# EAGLE board QRE1113 Line Sensor Breakout - Analog-GiantPanelv12 (EAGLE 6.4), part 1 of 6
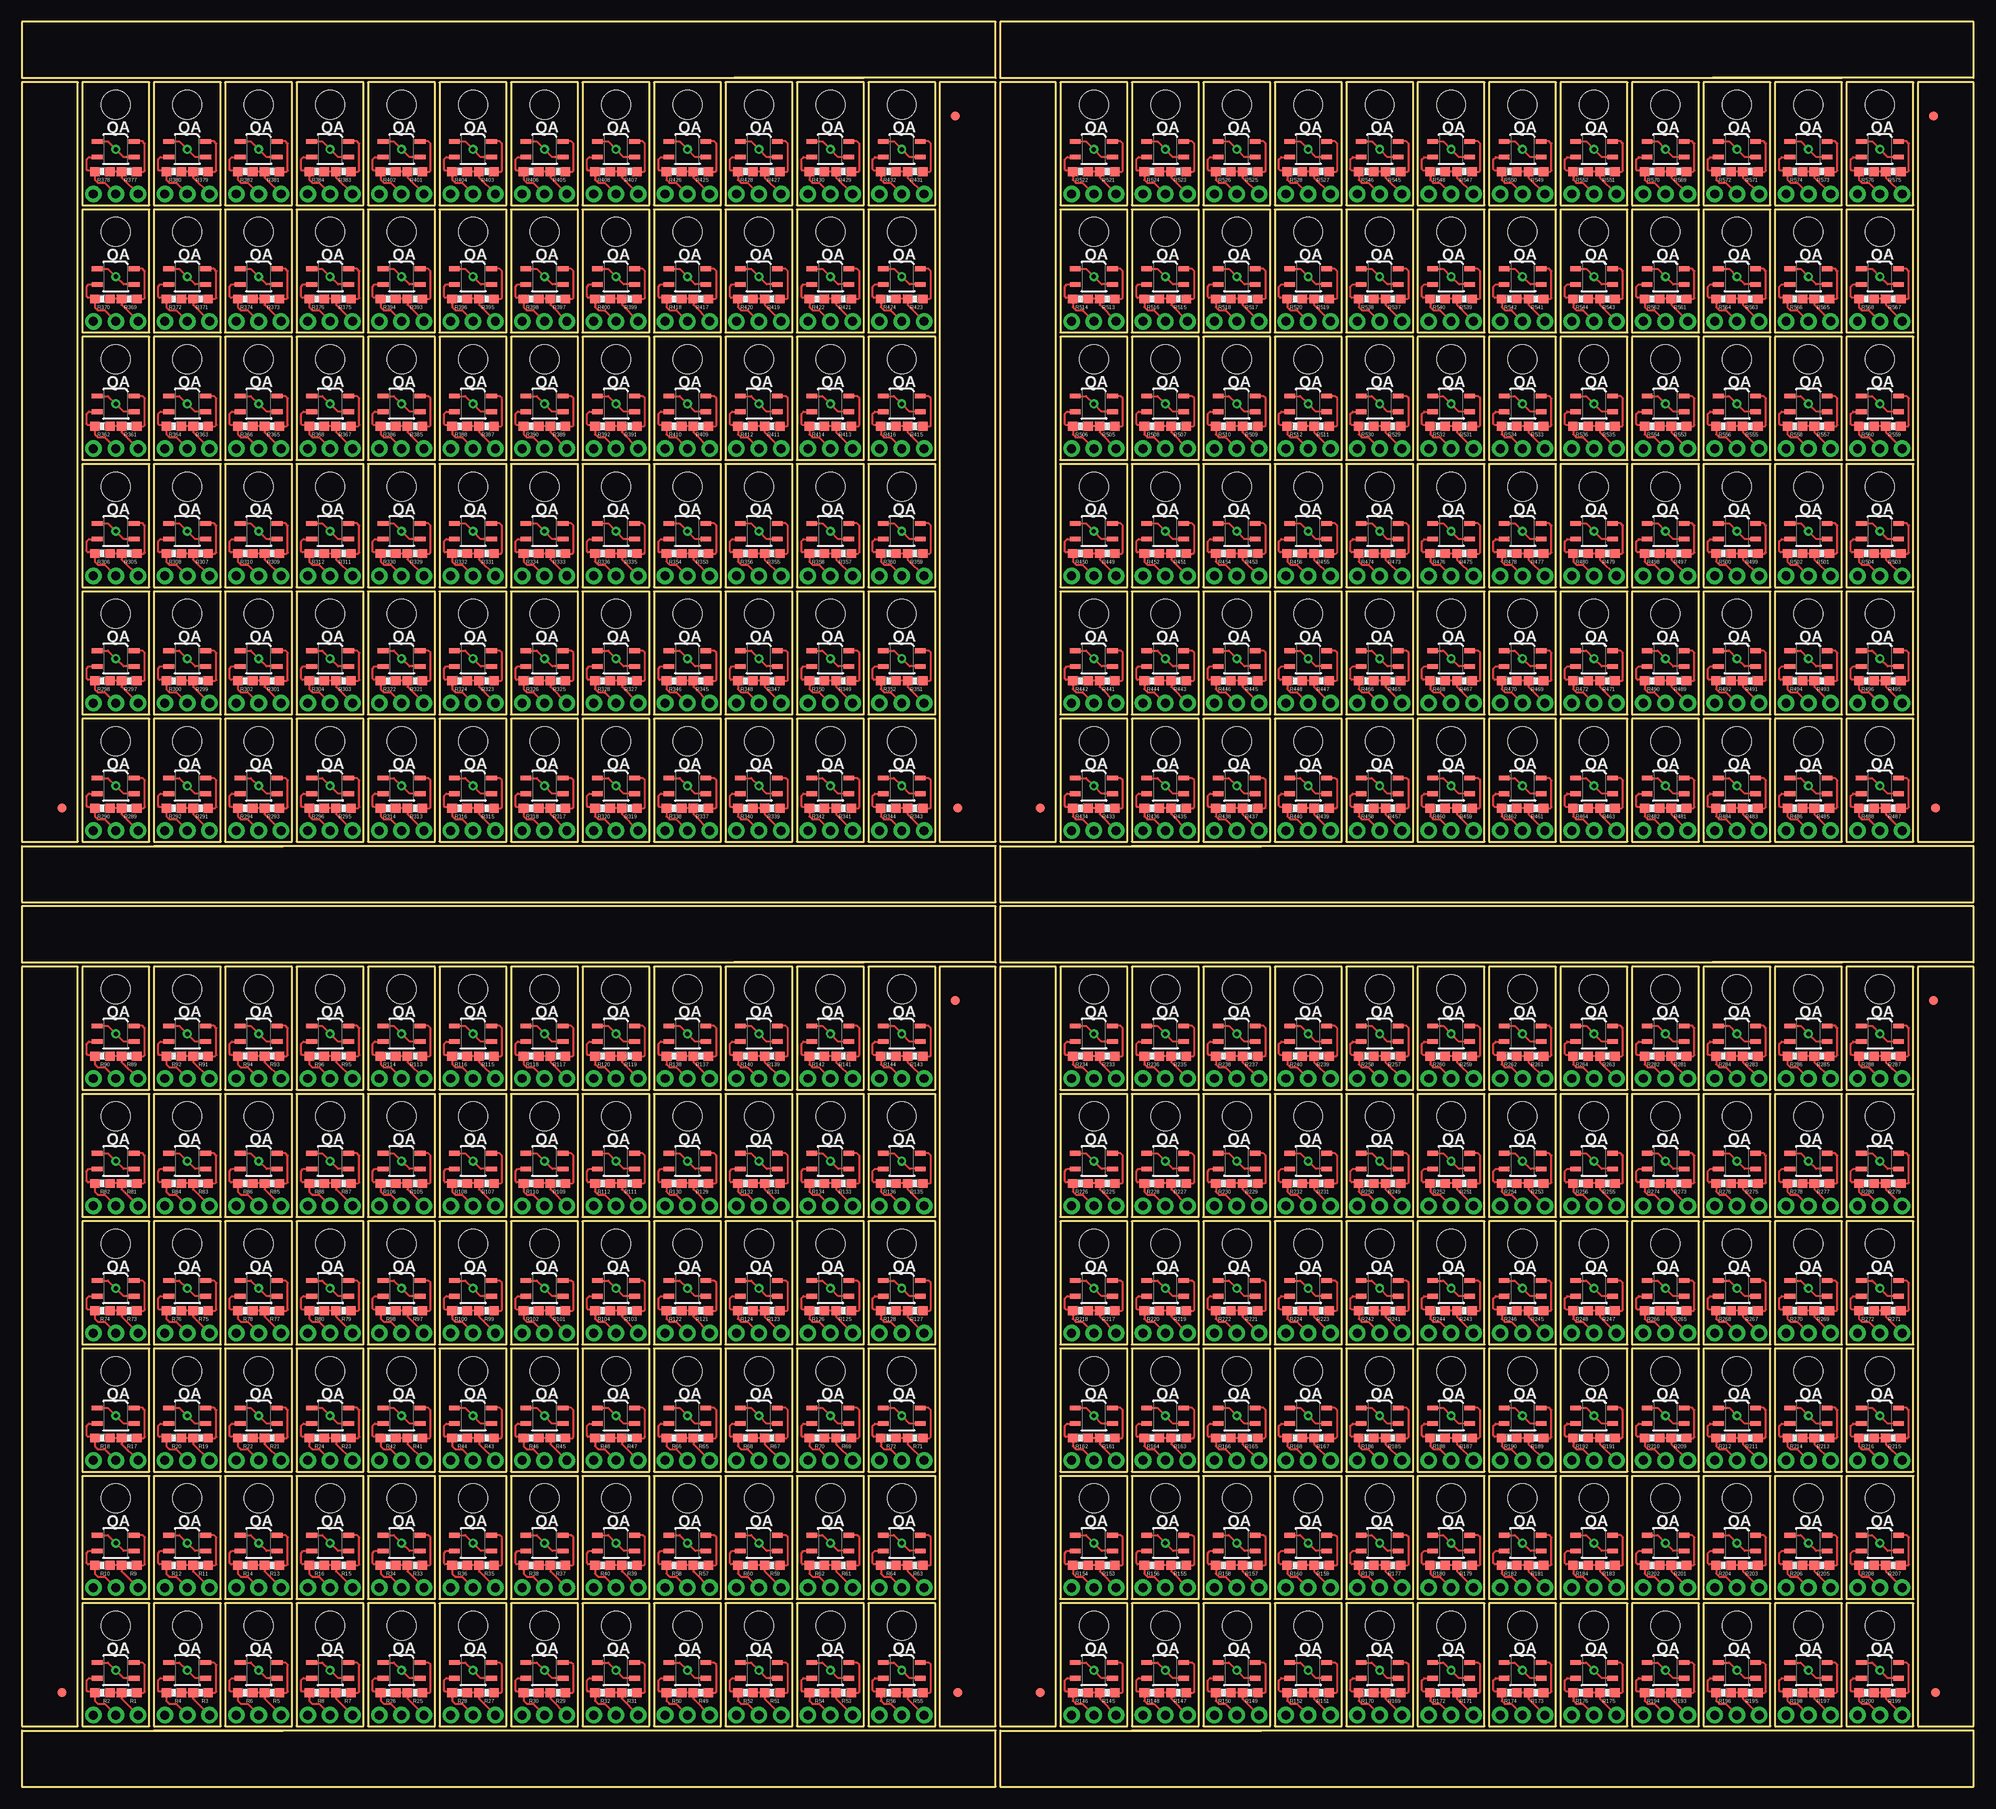
[diagram p0: board, top side]
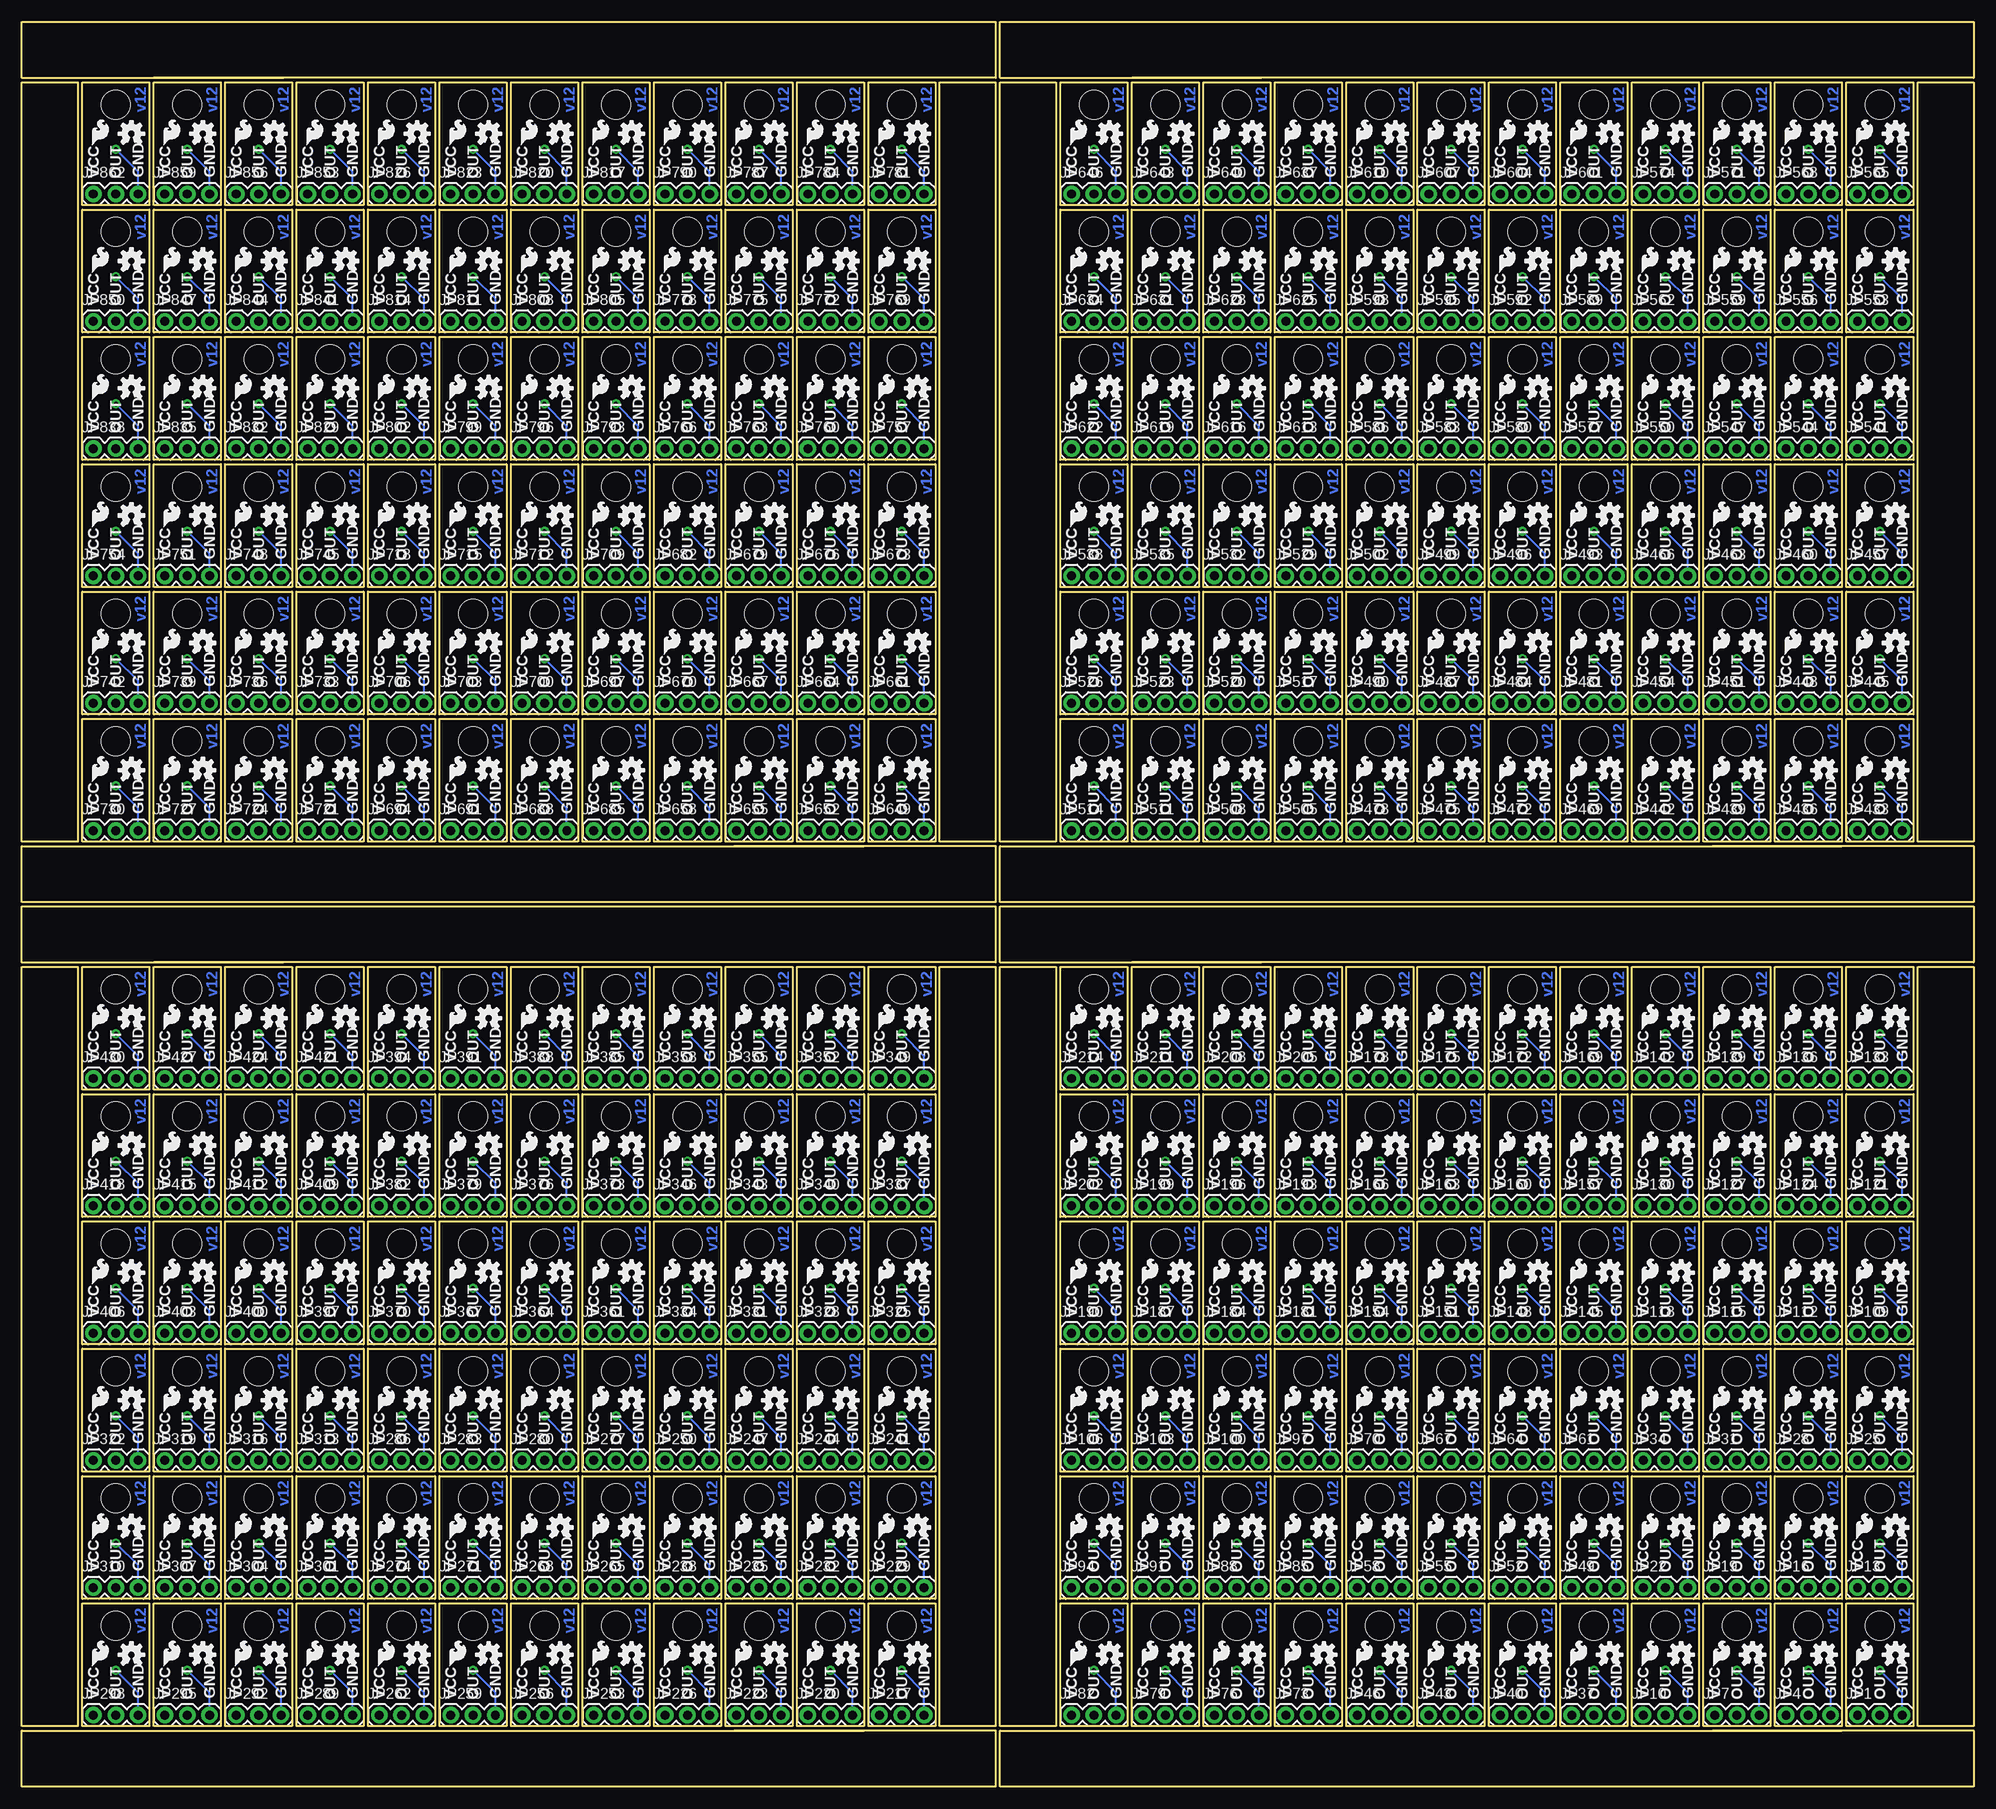
[diagram p1: board, bottom side, seen from below]

Size 222 x 200.66 mm. Coordinates in mm from the lower left corner, seen from the top.
Outline: 1224 segments
Copper layers (1*16): Top 0.035mm / dielectric 1.5mm / Bottom 0.035mm
Design rules "SparkFun *": minimum track width 8mil, minimum drill 20mil, track to track 8mil, track to pad 8mil, pad to pad 8mil, via to via 8mil, smd to smd 8mil, copper to edge 9mil, drill to drill 8mil, minimum pad ring 12mil, minimum via ring 10mil, stop-mask expansion 4mil, vias tented up to drill 20mil, thermal gap 10mil

## Footprints (pad centres in the part's own frame; a part is rotated, then mirrored left to right if it is on the bottom)
FIDUCIAL-1X2 = smd 1 x 1: 1 0,0
1X03 = drill 1.016 pad 1.88: 1 0,0; 2 2.54,0; 3 5.08,0
STAND-OFF = hole 3.302: 0,0
0603-RES = smd 1.1 x 1: 1 -0.85,0; 2 0.85,0
QRE1113-1:1 = smd 1.219 x 0.533: 1 -2.108,-0.889; 2 2.108,-0.889; 3 2.108,0.889; 4 -2.108,0.889

## Placement (x,y rotation side)
E$1  [FIDUCIAL-1X2]  4.57,10.67 0 top
E$4  [FIDUCIAL-1X2]  106.43,10.67 0 top
E$5  [FIDUCIAL-1X2]  106.17,89.41 180 top
E$9  [FIDUCIAL-1X2]  115.82,10.67 0 top
E$12  [FIDUCIAL-1X2]  217.68,10.67 0 top
E$13  [FIDUCIAL-1X2]  217.42,89.41 180 top
E$17  [FIDUCIAL-1X2]  4.57,111.25 0 top
E$20  [FIDUCIAL-1X2]  106.43,111.25 0 top
E$21  [FIDUCIAL-1X2]  106.17,189.99 180 top
E$25  [FIDUCIAL-1X2]  115.82,111.25 0 top
E$28  [FIDUCIAL-1X2]  217.68,111.25 0 top
E$29  [FIDUCIAL-1X2]  217.42,189.99 180 top
JP1  [1X03]  13.21,8.13 0 bottom
JP2  LOGO-SFESK  [SFE-LOGO-FLAME]  13.34,13.72 0 bottom
JP3  STAND-OFF  [STAND-OFF]  10.67,18.29 0 top
JP4  [1X03]  21.34,8.13 0 bottom
JP5  LOGO-SFESK  [SFE-LOGO-FLAME]  21.46,13.72 0 bottom
JP6  STAND-OFF  [STAND-OFF]  18.8,18.29 0 top
JP7  [1X03]  29.46,8.13 0 bottom
JP8  LOGO-SFESK  [SFE-LOGO-FLAME]  29.59,13.72 0 bottom
JP9  STAND-OFF  [STAND-OFF]  26.92,18.29 0 top
JP10  [1X03]  37.59,8.13 0 bottom
JP11  LOGO-SFESK  [SFE-LOGO-FLAME]  37.72,13.72 0 bottom
JP12  STAND-OFF  [STAND-OFF]  35.05,18.29 0 top
JP13  [1X03]  13.21,22.61 0 bottom
JP14  LOGO-SFESK  [SFE-LOGO-FLAME]  13.34,28.19 0 bottom
JP15  STAND-OFF  [STAND-OFF]  10.67,32.77 0 top
JP16  [1X03]  21.34,22.61 0 bottom
JP17  LOGO-SFESK  [SFE-LOGO-FLAME]  21.46,28.19 0 bottom
JP18  STAND-OFF  [STAND-OFF]  18.8,32.77 0 top
JP19  [1X03]  29.46,22.61 0 bottom
JP20  LOGO-SFESK  [SFE-LOGO-FLAME]  29.59,28.19 0 bottom
JP21  STAND-OFF  [STAND-OFF]  26.92,32.77 0 top
JP22  [1X03]  37.59,22.61 0 bottom
JP23  LOGO-SFESK  [SFE-LOGO-FLAME]  37.72,28.19 0 bottom
JP24  STAND-OFF  [STAND-OFF]  35.05,32.77 0 top
JP25  [1X03]  13.21,37.08 0 bottom
JP26  LOGO-SFESK  [SFE-LOGO-FLAME]  13.34,42.67 0 bottom
JP27  STAND-OFF  [STAND-OFF]  10.67,47.24 0 top
JP28  [1X03]  21.34,37.08 0 bottom
JP29  LOGO-SFESK  [SFE-LOGO-FLAME]  21.46,42.67 0 bottom
JP30  STAND-OFF  [STAND-OFF]  18.8,47.24 0 top
JP31  [1X03]  29.46,37.08 0 bottom
JP32  LOGO-SFESK  [SFE-LOGO-FLAME]  29.59,42.67 0 bottom
JP33  STAND-OFF  [STAND-OFF]  26.92,47.24 0 top
JP34  [1X03]  37.59,37.08 0 bottom
JP35  LOGO-SFESK  [SFE-LOGO-FLAME]  37.72,42.67 0 bottom
JP36  STAND-OFF  [STAND-OFF]  35.05,47.24 0 top
JP37  [1X03]  45.72,8.13 0 bottom
JP38  LOGO-SFESK  [SFE-LOGO-FLAME]  45.85,13.72 0 bottom
JP39  STAND-OFF  [STAND-OFF]  43.18,18.29 0 top
JP40  [1X03]  53.85,8.13 0 bottom
JP41  LOGO-SFESK  [SFE-LOGO-FLAME]  53.98,13.72 0 bottom
JP42  STAND-OFF  [STAND-OFF]  51.31,18.29 0 top
JP43  [1X03]  61.98,8.13 0 bottom
JP44  LOGO-SFESK  [SFE-LOGO-FLAME]  62.1,13.72 0 bottom
JP45  STAND-OFF  [STAND-OFF]  59.44,18.29 0 top
JP46  [1X03]  70.1,8.13 0 bottom
JP47  LOGO-SFESK  [SFE-LOGO-FLAME]  70.23,13.72 0 bottom
JP48  STAND-OFF  [STAND-OFF]  67.56,18.29 0 top
JP49  [1X03]  45.72,22.61 0 bottom
JP50  LOGO-SFESK  [SFE-LOGO-FLAME]  45.85,28.19 0 bottom
JP51  STAND-OFF  [STAND-OFF]  43.18,32.77 0 top
JP52  [1X03]  53.85,22.61 0 bottom
JP53  LOGO-SFESK  [SFE-LOGO-FLAME]  53.98,28.19 0 bottom
JP54  STAND-OFF  [STAND-OFF]  51.31,32.77 0 top
JP55  [1X03]  61.98,22.61 0 bottom
JP56  LOGO-SFESK  [SFE-LOGO-FLAME]  62.1,28.19 0 bottom
JP57  STAND-OFF  [STAND-OFF]  59.44,32.77 0 top
JP58  [1X03]  70.1,22.61 0 bottom
JP59  LOGO-SFESK  [SFE-LOGO-FLAME]  70.23,28.19 0 bottom
JP60  STAND-OFF  [STAND-OFF]  67.56,32.77 0 top
JP61  [1X03]  45.72,37.08 0 bottom
JP62  LOGO-SFESK  [SFE-LOGO-FLAME]  45.85,42.67 0 bottom
JP63  STAND-OFF  [STAND-OFF]  43.18,47.24 0 top
JP64  [1X03]  53.85,37.08 0 bottom
JP65  LOGO-SFESK  [SFE-LOGO-FLAME]  53.98,42.67 0 bottom
JP66  STAND-OFF  [STAND-OFF]  51.31,47.24 0 top
JP67  [1X03]  61.98,37.08 0 bottom
JP68  LOGO-SFESK  [SFE-LOGO-FLAME]  62.1,42.67 0 bottom
JP69  STAND-OFF  [STAND-OFF]  59.44,47.24 0 top
JP70  [1X03]  70.1,37.08 0 bottom
JP71  LOGO-SFESK  [SFE-LOGO-FLAME]  70.23,42.67 0 bottom
JP72  STAND-OFF  [STAND-OFF]  67.56,47.24 0 top
JP73  [1X03]  78.23,8.13 0 bottom
JP74  LOGO-SFESK  [SFE-LOGO-FLAME]  78.36,13.72 0 bottom
JP75  STAND-OFF  [STAND-OFF]  75.69,18.29 0 top
JP76  [1X03]  86.36,8.13 0 bottom
JP77  LOGO-SFESK  [SFE-LOGO-FLAME]  86.49,13.72 0 bottom
JP78  STAND-OFF  [STAND-OFF]  83.82,18.29 0 top
JP79  [1X03]  94.49,8.13 0 bottom
JP80  LOGO-SFESK  [SFE-LOGO-FLAME]  94.61,13.72 0 bottom
JP81  STAND-OFF  [STAND-OFF]  91.95,18.29 0 top
JP82  [1X03]  102.62,8.13 0 bottom
JP83  LOGO-SFESK  [SFE-LOGO-FLAME]  102.74,13.72 0 bottom
JP84  STAND-OFF  [STAND-OFF]  100.08,18.29 0 top
JP85  [1X03]  78.23,22.61 0 bottom
JP86  LOGO-SFESK  [SFE-LOGO-FLAME]  78.36,28.19 0 bottom
JP87  STAND-OFF  [STAND-OFF]  75.69,32.77 0 top
JP88  [1X03]  86.36,22.61 0 bottom
JP89  LOGO-SFESK  [SFE-LOGO-FLAME]  86.49,28.19 0 bottom
JP90  STAND-OFF  [STAND-OFF]  83.82,32.77 0 top
JP91  [1X03]  94.49,22.61 0 bottom
JP92  LOGO-SFESK  [SFE-LOGO-FLAME]  94.61,28.19 0 bottom
JP93  STAND-OFF  [STAND-OFF]  91.95,32.77 0 top
JP94  [1X03]  102.62,22.61 0 bottom
JP95  LOGO-SFESK  [SFE-LOGO-FLAME]  102.74,28.19 0 bottom
JP96  STAND-OFF  [STAND-OFF]  100.08,32.77 0 top
JP97  [1X03]  78.23,37.08 0 bottom
JP98  LOGO-SFESK  [SFE-LOGO-FLAME]  78.36,42.67 0 bottom
JP99  STAND-OFF  [STAND-OFF]  75.69,47.24 0 top
JP100  [1X03]  86.36,37.08 0 bottom
JP101  LOGO-SFESK  [SFE-LOGO-FLAME]  86.49,42.67 0 bottom
JP102  STAND-OFF  [STAND-OFF]  83.82,47.24 0 top
JP103  [1X03]  94.49,37.08 0 bottom
JP104  LOGO-SFESK  [SFE-LOGO-FLAME]  94.61,42.67 0 bottom
JP105  STAND-OFF  [STAND-OFF]  91.95,47.24 0 top
JP106  [1X03]  102.62,37.08 0 bottom
JP107  LOGO-SFESK  [SFE-LOGO-FLAME]  102.74,42.67 0 bottom
JP108  STAND-OFF  [STAND-OFF]  100.08,47.24 0 top
JP109  [1X03]  13.21,51.56 0 bottom
JP110  LOGO-SFESK  [SFE-LOGO-FLAME]  13.34,57.15 0 bottom
JP111  STAND-OFF  [STAND-OFF]  10.67,61.72 0 top
JP112  [1X03]  21.34,51.56 0 bottom
JP113  LOGO-SFESK  [SFE-LOGO-FLAME]  21.46,57.15 0 bottom
JP114  STAND-OFF  [STAND-OFF]  18.8,61.72 0 top
JP115  [1X03]  29.46,51.56 0 bottom
JP116  LOGO-SFESK  [SFE-LOGO-FLAME]  29.59,57.15 0 bottom
JP117  STAND-OFF  [STAND-OFF]  26.92,61.72 0 top
JP118  [1X03]  37.59,51.56 0 bottom
JP119  LOGO-SFESK  [SFE-LOGO-FLAME]  37.72,57.15 0 bottom
JP120  STAND-OFF  [STAND-OFF]  35.05,61.72 0 top
JP121  [1X03]  13.21,66.04 0 bottom
JP122  LOGO-SFESK  [SFE-LOGO-FLAME]  13.34,71.63 0 bottom
JP123  STAND-OFF  [STAND-OFF]  10.67,76.2 0 top
JP124  [1X03]  21.34,66.04 0 bottom
JP125  LOGO-SFESK  [SFE-LOGO-FLAME]  21.46,71.63 0 bottom
JP126  STAND-OFF  [STAND-OFF]  18.8,76.2 0 top
JP127  [1X03]  29.46,66.04 0 bottom
JP128  LOGO-SFESK  [SFE-LOGO-FLAME]  29.59,71.63 0 bottom
JP129  STAND-OFF  [STAND-OFF]  26.92,76.2 0 top
JP130  [1X03]  37.59,66.04 0 bottom
JP131  LOGO-SFESK  [SFE-LOGO-FLAME]  37.72,71.63 0 bottom
JP132  STAND-OFF  [STAND-OFF]  35.05,76.2 0 top
JP133  [1X03]  13.21,80.52 0 bottom
JP134  LOGO-SFESK  [SFE-LOGO-FLAME]  13.34,86.11 0 bottom
JP135  STAND-OFF  [STAND-OFF]  10.67,90.68 0 top
JP136  [1X03]  21.34,80.52 0 bottom
JP137  LOGO-SFESK  [SFE-LOGO-FLAME]  21.46,86.11 0 bottom
JP138  STAND-OFF  [STAND-OFF]  18.8,90.68 0 top
JP139  [1X03]  29.46,80.52 0 bottom
JP140  LOGO-SFESK  [SFE-LOGO-FLAME]  29.59,86.11 0 bottom
JP141  STAND-OFF  [STAND-OFF]  26.92,90.68 0 top
JP142  [1X03]  37.59,80.52 0 bottom
JP143  LOGO-SFESK  [SFE-LOGO-FLAME]  37.72,86.11 0 bottom
JP144  STAND-OFF  [STAND-OFF]  35.05,90.68 0 top
JP145  [1X03]  45.72,51.56 0 bottom
JP146  LOGO-SFESK  [SFE-LOGO-FLAME]  45.85,57.15 0 bottom
JP147  STAND-OFF  [STAND-OFF]  43.18,61.72 0 top
JP148  [1X03]  53.85,51.56 0 bottom
JP149  LOGO-SFESK  [SFE-LOGO-FLAME]  53.98,57.15 0 bottom
JP150  STAND-OFF  [STAND-OFF]  51.31,61.72 0 top
JP151  [1X03]  61.98,51.56 0 bottom
JP152  LOGO-SFESK  [SFE-LOGO-FLAME]  62.1,57.15 0 bottom
JP153  STAND-OFF  [STAND-OFF]  59.44,61.72 0 top
JP154  [1X03]  70.1,51.56 0 bottom
JP155  LOGO-SFESK  [SFE-LOGO-FLAME]  70.23,57.15 0 bottom
JP156  STAND-OFF  [STAND-OFF]  67.56,61.72 0 top
JP157  [1X03]  45.72,66.04 0 bottom
JP158  LOGO-SFESK  [SFE-LOGO-FLAME]  45.85,71.63 0 bottom
JP159  STAND-OFF  [STAND-OFF]  43.18,76.2 0 top
JP160  [1X03]  53.85,66.04 0 bottom
JP161  LOGO-SFESK  [SFE-LOGO-FLAME]  53.98,71.63 0 bottom
JP162  STAND-OFF  [STAND-OFF]  51.31,76.2 0 top
JP163  [1X03]  61.98,66.04 0 bottom
JP164  LOGO-SFESK  [SFE-LOGO-FLAME]  62.1,71.63 0 bottom
JP165  STAND-OFF  [STAND-OFF]  59.44,76.2 0 top
JP166  [1X03]  70.1,66.04 0 bottom
JP167  LOGO-SFESK  [SFE-LOGO-FLAME]  70.23,71.63 0 bottom
JP168  STAND-OFF  [STAND-OFF]  67.56,76.2 0 top
JP169  [1X03]  45.72,80.52 0 bottom
JP170  LOGO-SFESK  [SFE-LOGO-FLAME]  45.85,86.11 0 bottom
JP171  STAND-OFF  [STAND-OFF]  43.18,90.68 0 top
JP172  [1X03]  53.85,80.52 0 bottom
JP173  LOGO-SFESK  [SFE-LOGO-FLAME]  53.98,86.11 0 bottom
JP174  STAND-OFF  [STAND-OFF]  51.31,90.68 0 top
JP175  [1X03]  61.98,80.52 0 bottom
JP176  LOGO-SFESK  [SFE-LOGO-FLAME]  62.1,86.11 0 bottom
JP177  STAND-OFF  [STAND-OFF]  59.44,90.68 0 top
JP178  [1X03]  70.1,80.52 0 bottom
JP179  LOGO-SFESK  [SFE-LOGO-FLAME]  70.23,86.11 0 bottom
JP180  STAND-OFF  [STAND-OFF]  67.56,90.68 0 top
JP181  [1X03]  78.23,51.56 0 bottom
JP182  LOGO-SFESK  [SFE-LOGO-FLAME]  78.36,57.15 0 bottom
JP183  STAND-OFF  [STAND-OFF]  75.69,61.72 0 top
JP184  [1X03]  86.36,51.56 0 bottom
JP185  LOGO-SFESK  [SFE-LOGO-FLAME]  86.49,57.15 0 bottom
JP186  STAND-OFF  [STAND-OFF]  83.82,61.72 0 top
JP187  [1X03]  94.49,51.56 0 bottom
JP188  LOGO-SFESK  [SFE-LOGO-FLAME]  94.61,57.15 0 bottom
JP189  STAND-OFF  [STAND-OFF]  91.95,61.72 0 top
JP190  [1X03]  102.62,51.56 0 bottom
JP191  LOGO-SFESK  [SFE-LOGO-FLAME]  102.74,57.15 0 bottom
JP192  STAND-OFF  [STAND-OFF]  100.08,61.72 0 top
JP193  [1X03]  78.23,66.04 0 bottom
JP194  LOGO-SFESK  [SFE-LOGO-FLAME]  78.36,71.63 0 bottom
JP195  STAND-OFF  [STAND-OFF]  75.69,76.2 0 top
JP196  [1X03]  86.36,66.04 0 bottom
JP197  LOGO-SFESK  [SFE-LOGO-FLAME]  86.49,71.63 0 bottom
JP198  STAND-OFF  [STAND-OFF]  83.82,76.2 0 top
JP199  [1X03]  94.49,66.04 0 bottom
JP200  LOGO-SFESK  [SFE-LOGO-FLAME]  94.61,71.63 0 bottom
JP201  STAND-OFF  [STAND-OFF]  91.95,76.2 0 top
JP202  [1X03]  102.62,66.04 0 bottom
JP203  LOGO-SFESK  [SFE-LOGO-FLAME]  102.74,71.63 0 bottom
JP204  STAND-OFF  [STAND-OFF]  100.08,76.2 0 top
JP205  [1X03]  78.23,80.52 0 bottom
JP206  LOGO-SFESK  [SFE-LOGO-FLAME]  78.36,86.11 0 bottom
JP207  STAND-OFF  [STAND-OFF]  75.69,90.68 0 top
JP208  [1X03]  86.36,80.52 0 bottom
JP209  LOGO-SFESK  [SFE-LOGO-FLAME]  86.49,86.11 0 bottom
JP210  STAND-OFF  [STAND-OFF]  83.82,90.68 0 top
JP211  [1X03]  94.49,80.52 0 bottom
JP212  LOGO-SFESK  [SFE-LOGO-FLAME]  94.61,86.11 0 bottom
JP213  STAND-OFF  [STAND-OFF]  91.95,90.68 0 top
JP214  [1X03]  102.62,80.52 0 bottom
JP215  LOGO-SFESK  [SFE-LOGO-FLAME]  102.74,86.11 0 bottom
JP216  STAND-OFF  [STAND-OFF]  100.08,90.68 0 top
JP217  [1X03]  124.46,8.13 0 bottom
JP218  LOGO-SFESK  [SFE-LOGO-FLAME]  124.59,13.72 0 bottom
JP219  STAND-OFF  [STAND-OFF]  121.92,18.29 0 top
JP220  [1X03]  132.59,8.13 0 bottom
JP221  LOGO-SFESK  [SFE-LOGO-FLAME]  132.72,13.72 0 bottom
JP222  STAND-OFF  [STAND-OFF]  130.05,18.29 0 top
JP223  [1X03]  140.72,8.13 0 bottom
JP224  LOGO-SFESK  [SFE-LOGO-FLAME]  140.84,13.72 0 bottom
JP225  STAND-OFF  [STAND-OFF]  138.18,18.29 0 top
JP226  [1X03]  148.84,8.13 0 bottom
JP227  LOGO-SFESK  [SFE-LOGO-FLAME]  148.97,13.72 0 bottom
JP228  STAND-OFF  [STAND-OFF]  146.3,18.29 0 top
JP229  [1X03]  124.46,22.61 0 bottom
JP230  LOGO-SFESK  [SFE-LOGO-FLAME]  124.59,28.19 0 bottom
JP231  STAND-OFF  [STAND-OFF]  121.92,32.77 0 top
JP232  [1X03]  132.59,22.61 0 bottom
JP233  LOGO-SFESK  [SFE-LOGO-FLAME]  132.72,28.19 0 bottom
JP234  STAND-OFF  [STAND-OFF]  130.05,32.77 0 top
JP235  [1X03]  140.72,22.61 0 bottom
JP236  LOGO-SFESK  [SFE-LOGO-FLAME]  140.84,28.19 0 bottom
JP237  STAND-OFF  [STAND-OFF]  138.18,32.77 0 top
JP238  [1X03]  148.84,22.61 0 bottom
JP239  LOGO-SFESK  [SFE-LOGO-FLAME]  148.97,28.19 0 bottom
JP240  STAND-OFF  [STAND-OFF]  146.3,32.77 0 top
JP241  [1X03]  124.46,37.08 0 bottom
JP242  LOGO-SFESK  [SFE-LOGO-FLAME]  124.59,42.67 0 bottom
JP243  STAND-OFF  [STAND-OFF]  121.92,47.24 0 top
JP244  [1X03]  132.59,37.08 0 bottom
JP245  LOGO-SFESK  [SFE-LOGO-FLAME]  132.72,42.67 0 bottom
JP246  STAND-OFF  [STAND-OFF]  130.05,47.24 0 top
JP247  [1X03]  140.72,37.08 0 bottom
JP248  LOGO-SFESK  [SFE-LOGO-FLAME]  140.84,42.67 0 bottom
JP249  STAND-OFF  [STAND-OFF]  138.18,47.24 0 top
JP250  [1X03]  148.84,37.08 0 bottom
JP251  LOGO-SFESK  [SFE-LOGO-FLAME]  148.97,42.67 0 bottom
JP252  STAND-OFF  [STAND-OFF]  146.3,47.24 0 top
JP253  [1X03]  156.97,8.13 0 bottom
JP254  LOGO-SFESK  [SFE-LOGO-FLAME]  157.1,13.72 0 bottom
JP255  STAND-OFF  [STAND-OFF]  154.43,18.29 0 top
JP256  [1X03]  165.1,8.13 0 bottom
JP257  LOGO-SFESK  [SFE-LOGO-FLAME]  165.23,13.72 0 bottom
JP258  STAND-OFF  [STAND-OFF]  162.56,18.29 0 top
JP259  [1X03]  173.23,8.13 0 bottom
JP260  LOGO-SFESK  [SFE-LOGO-FLAME]  173.35,13.72 0 bottom
JP261  STAND-OFF  [STAND-OFF]  170.69,18.29 0 top
JP262  [1X03]  181.36,8.13 0 bottom
JP263  LOGO-SFESK  [SFE-LOGO-FLAME]  181.48,13.72 0 bottom
JP264  STAND-OFF  [STAND-OFF]  178.82,18.29 0 top
JP265  [1X03]  156.97,22.61 0 bottom
JP266  LOGO-SFESK  [SFE-LOGO-FLAME]  157.1,28.19 0 bottom
JP267  STAND-OFF  [STAND-OFF]  154.43,32.77 0 top
JP268  [1X03]  165.1,22.61 0 bottom
JP269  LOGO-SFESK  [SFE-LOGO-FLAME]  165.23,28.19 0 bottom
JP270  STAND-OFF  [STAND-OFF]  162.56,32.77 0 top
JP271  [1X03]  173.23,22.61 0 bottom
JP272  LOGO-SFESK  [SFE-LOGO-FLAME]  173.35,28.19 0 bottom
JP273  STAND-OFF  [STAND-OFF]  170.69,32.77 0 top
JP274  [1X03]  181.36,22.61 0 bottom
JP275  LOGO-SFESK  [SFE-LOGO-FLAME]  181.48,28.19 0 bottom
JP276  STAND-OFF  [STAND-OFF]  178.82,32.77 0 top
JP277  [1X03]  156.97,37.08 0 bottom
JP278  LOGO-SFESK  [SFE-LOGO-FLAME]  157.1,42.67 0 bottom
JP279  STAND-OFF  [STAND-OFF]  154.43,47.24 0 top
JP280  [1X03]  165.1,37.08 0 bottom
JP281  LOGO-SFESK  [SFE-LOGO-FLAME]  165.23,42.67 0 bottom
JP282  STAND-OFF  [STAND-OFF]  162.56,47.24 0 top
JP283  [1X03]  173.23,37.08 0 bottom
JP284  LOGO-SFESK  [SFE-LOGO-FLAME]  173.35,42.67 0 bottom
JP285  STAND-OFF  [STAND-OFF]  170.69,47.24 0 top
JP286  [1X03]  181.36,37.08 0 bottom
JP287  LOGO-SFESK  [SFE-LOGO-FLAME]  181.48,42.67 0 bottom
JP288  STAND-OFF  [STAND-OFF]  178.82,47.24 0 top
JP289  [1X03]  189.48,8.13 0 bottom
JP290  LOGO-SFESK  [SFE-LOGO-FLAME]  189.61,13.72 0 bottom
JP291  STAND-OFF  [STAND-OFF]  186.94,18.29 0 top
JP292  [1X03]  197.61,8.13 0 bottom
JP293  LOGO-SFESK  [SFE-LOGO-FLAME]  197.74,13.72 0 bottom
JP294  STAND-OFF  [STAND-OFF]  195.07,18.29 0 top
JP295  [1X03]  205.74,8.13 0 bottom
JP296  LOGO-SFESK  [SFE-LOGO-FLAME]  205.87,13.72 0 bottom
JP297  STAND-OFF  [STAND-OFF]  203.2,18.29 0 top
JP298  [1X03]  213.87,8.13 0 bottom
JP299  LOGO-SFESK  [SFE-LOGO-FLAME]  214,13.72 0 bottom
JP300  STAND-OFF  [STAND-OFF]  211.33,18.29 0 top
JP301  [1X03]  189.48,22.61 0 bottom
JP302  LOGO-SFESK  [SFE-LOGO-FLAME]  189.61,28.19 0 bottom
JP303  STAND-OFF  [STAND-OFF]  186.94,32.77 0 top
JP304  [1X03]  197.61,22.61 0 bottom
JP305  LOGO-SFESK  [SFE-LOGO-FLAME]  197.74,28.19 0 bottom
JP306  STAND-OFF  [STAND-OFF]  195.07,32.77 0 top
JP307  [1X03]  205.74,22.61 0 bottom
JP308  LOGO-SFESK  [SFE-LOGO-FLAME]  205.87,28.19 0 bottom
JP309  STAND-OFF  [STAND-OFF]  203.2,32.77 0 top
JP310  [1X03]  213.87,22.61 0 bottom
JP311  LOGO-SFESK  [SFE-LOGO-FLAME]  214,28.19 0 bottom
JP312  STAND-OFF  [STAND-OFF]  211.33,32.77 0 top
JP313  [1X03]  189.48,37.08 0 bottom
JP314  LOGO-SFESK  [SFE-LOGO-FLAME]  189.61,42.67 0 bottom
JP315  STAND-OFF  [STAND-OFF]  186.94,47.24 0 top
JP316  [1X03]  197.61,37.08 0 bottom
JP317  LOGO-SFESK  [SFE-LOGO-FLAME]  197.74,42.67 0 bottom
JP318  STAND-OFF  [STAND-OFF]  195.07,47.24 0 top
JP319  [1X03]  205.74,37.08 0 bottom
JP320  LOGO-SFESK  [SFE-LOGO-FLAME]  205.87,42.67 0 bottom
JP321  STAND-OFF  [STAND-OFF]  203.2,47.24 0 top
JP322  [1X03]  213.87,37.08 0 bottom
JP323  LOGO-SFESK  [SFE-LOGO-FLAME]  214,42.67 0 bottom
JP324  STAND-OFF  [STAND-OFF]  211.33,47.24 0 top
JP325  [1X03]  124.46,51.56 0 bottom
JP326  LOGO-SFESK  [SFE-LOGO-FLAME]  124.59,57.15 0 bottom
JP327  STAND-OFF  [STAND-OFF]  121.92,61.72 0 top
JP328  [1X03]  132.59,51.56 0 bottom
JP329  LOGO-SFESK  [SFE-LOGO-FLAME]  132.72,57.15 0 bottom
JP330  STAND-OFF  [STAND-OFF]  130.05,61.72 0 top
JP331  [1X03]  140.72,51.56 0 bottom
JP332  LOGO-SFESK  [SFE-LOGO-FLAME]  140.84,57.15 0 bottom
JP333  STAND-OFF  [STAND-OFF]  138.18,61.72 0 top
JP334  [1X03]  148.84,51.56 0 bottom
JP335  LOGO-SFESK  [SFE-LOGO-FLAME]  148.97,57.15 0 bottom
JP336  STAND-OFF  [STAND-OFF]  146.3,61.72 0 top
JP337  [1X03]  124.46,66.04 0 bottom
JP338  LOGO-SFESK  [SFE-LOGO-FLAME]  124.59,71.63 0 bottom
JP339  STAND-OFF  [STAND-OFF]  121.92,76.2 0 top
JP340  [1X03]  132.59,66.04 0 bottom
JP341  LOGO-SFESK  [SFE-LOGO-FLAME]  132.72,71.63 0 bottom
JP342  STAND-OFF  [STAND-OFF]  130.05,76.2 0 top
JP343  [1X03]  140.72,66.04 0 bottom
JP344  LOGO-SFESK  [SFE-LOGO-FLAME]  140.84,71.63 0 bottom
JP345  STAND-OFF  [STAND-OFF]  138.18,76.2 0 top
JP346  [1X03]  148.84,66.04 0 bottom
JP347  LOGO-SFESK  [SFE-LOGO-FLAME]  148.97,71.63 0 bottom
JP348  STAND-OFF  [STAND-OFF]  146.3,76.2 0 top
JP349  [1X03]  124.46,80.52 0 bottom
JP350  LOGO-SFESK  [SFE-LOGO-FLAME]  124.59,86.11 0 bottom
JP351  STAND-OFF  [STAND-OFF]  121.92,90.68 0 top
JP352  [1X03]  132.59,80.52 0 bottom
JP353  LOGO-SFESK  [SFE-LOGO-FLAME]  132.72,86.11 0 bottom
JP354  STAND-OFF  [STAND-OFF]  130.05,90.68 0 top
JP355  [1X03]  140.72,80.52 0 bottom
JP356  LOGO-SFESK  [SFE-LOGO-FLAME]  140.84,86.11 0 bottom
JP357  STAND-OFF  [STAND-OFF]  138.18,90.68 0 top
JP358  [1X03]  148.84,80.52 0 bottom
JP359  LOGO-SFESK  [SFE-LOGO-FLAME]  148.97,86.11 0 bottom
JP360  STAND-OFF  [STAND-OFF]  146.3,90.68 0 top
JP361  [1X03]  156.97,51.56 0 bottom
JP362  LOGO-SFESK  [SFE-LOGO-FLAME]  157.1,57.15 0 bottom
JP363  STAND-OFF  [STAND-OFF]  154.43,61.72 0 top
JP364  [1X03]  165.1,51.56 0 bottom
JP365  LOGO-SFESK  [SFE-LOGO-FLAME]  165.23,57.15 0 bottom
JP366  STAND-OFF  [STAND-OFF]  162.56,61.72 0 top
JP367  [1X03]  173.23,51.56 0 bottom
JP368  LOGO-SFESK  [SFE-LOGO-FLAME]  173.35,57.15 0 bottom
JP369  STAND-OFF  [STAND-OFF]  170.69,61.72 0 top
JP370  [1X03]  181.36,51.56 0 bottom
JP371  LOGO-SFESK  [SFE-LOGO-FLAME]  181.48,57.15 0 bottom
JP372  STAND-OFF  [STAND-OFF]  178.82,61.72 0 top
JP373  [1X03]  156.97,66.04 0 bottom
JP374  LOGO-SFESK  [SFE-LOGO-FLAME]  157.1,71.63 0 bottom
JP375  STAND-OFF  [STAND-OFF]  154.43,76.2 0 top
JP376  [1X03]  165.1,66.04 0 bottom
JP377  LOGO-SFESK  [SFE-LOGO-FLAME]  165.23,71.63 0 bottom
JP378  STAND-OFF  [STAND-OFF]  162.56,76.2 0 top
JP379  [1X03]  173.23,66.04 0 bottom
JP380  LOGO-SFESK  [SFE-LOGO-FLAME]  173.35,71.63 0 bottom
JP381  STAND-OFF  [STAND-OFF]  170.69,76.2 0 top
JP382  [1X03]  181.36,66.04 0 bottom
JP383  LOGO-SFESK  [SFE-LOGO-FLAME]  181.48,71.63 0 bottom
JP384  STAND-OFF  [STAND-OFF]  178.82,76.2 0 top
JP385  [1X03]  156.97,80.52 0 bottom
JP386  LOGO-SFESK  [SFE-LOGO-FLAME]  157.1,86.11 0 bottom
JP387  STAND-OFF  [STAND-OFF]  154.43,90.68 0 top
JP388  [1X03]  165.1,80.52 0 bottom
JP389  LOGO-SFESK  [SFE-LOGO-FLAME]  165.23,86.11 0 bottom
JP390  STAND-OFF  [STAND-OFF]  162.56,90.68 0 top
JP391  [1X03]  173.23,80.52 0 bottom
JP392  LOGO-SFESK  [SFE-LOGO-FLAME]  173.35,86.11 0 bottom
JP393  STAND-OFF  [STAND-OFF]  170.69,90.68 0 top
JP394  [1X03]  181.36,80.52 0 bottom
JP395  LOGO-SFESK  [SFE-LOGO-FLAME]  181.48,86.11 0 bottom
JP396  STAND-OFF  [STAND-OFF]  178.82,90.68 0 top
JP397  [1X03]  189.48,51.56 0 bottom
JP398  LOGO-SFESK  [SFE-LOGO-FLAME]  189.61,57.15 0 bottom
JP399  STAND-OFF  [STAND-OFF]  186.94,61.72 0 top
JP400  [1X03]  197.61,51.56 0 bottom
JP401  LOGO-SFESK  [SFE-LOGO-FLAME]  197.74,57.15 0 bottom
JP402  STAND-OFF  [STAND-OFF]  195.07,61.72 0 top
JP403  [1X03]  205.74,51.56 0 bottom
JP404  LOGO-SFESK  [SFE-LOGO-FLAME]  205.87,57.15 0 bottom
JP405  STAND-OFF  [STAND-OFF]  203.2,61.72 0 top
JP406  [1X03]  213.87,51.56 0 bottom
JP407  LOGO-SFESK  [SFE-LOGO-FLAME]  214,57.15 0 bottom
JP408  STAND-OFF  [STAND-OFF]  211.33,61.72 0 top
JP409  [1X03]  189.48,66.04 0 bottom
JP410  LOGO-SFESK  [SFE-LOGO-FLAME]  189.61,71.63 0 bottom
JP411  STAND-OFF  [STAND-OFF]  186.94,76.2 0 top
JP412  [1X03]  197.61,66.04 0 bottom
JP413  LOGO-SFESK  [SFE-LOGO-FLAME]  197.74,71.63 0 bottom
JP414  STAND-OFF  [STAND-OFF]  195.07,76.2 0 top
JP415  [1X03]  205.74,66.04 0 bottom
JP416  LOGO-SFESK  [SFE-LOGO-FLAME]  205.87,71.63 0 bottom
JP417  STAND-OFF  [STAND-OFF]  203.2,76.2 0 top
JP418  [1X03]  213.87,66.04 0 bottom
JP419  LOGO-SFESK  [SFE-LOGO-FLAME]  214,71.63 0 bottom
JP420  STAND-OFF  [STAND-OFF]  211.33,76.2 0 top
JP421  [1X03]  189.48,80.52 0 bottom
JP422  LOGO-SFESK  [SFE-LOGO-FLAME]  189.61,86.11 0 bottom
JP423  STAND-OFF  [STAND-OFF]  186.94,90.68 0 top
JP424  [1X03]  197.61,80.52 0 bottom
JP425  LOGO-SFESK  [SFE-LOGO-FLAME]  197.74,86.11 0 bottom
JP426  STAND-OFF  [STAND-OFF]  195.07,90.68 0 top
JP427  [1X03]  205.74,80.52 0 bottom
JP428  LOGO-SFESK  [SFE-LOGO-FLAME]  205.87,86.11 0 bottom
JP429  STAND-OFF  [STAND-OFF]  203.2,90.68 0 top
JP430  [1X03]  213.87,80.52 0 bottom
JP431  LOGO-SFESK  [SFE-LOGO-FLAME]  214,86.11 0 bottom
JP432  STAND-OFF  [STAND-OFF]  211.33,90.68 0 top
JP433  [1X03]  13.21,108.71 0 bottom
JP434  LOGO-SFESK  [SFE-LOGO-FLAME]  13.34,114.3 0 bottom
JP435  STAND-OFF  [STAND-OFF]  10.67,118.87 0 top
JP436  [1X03]  21.34,108.71 0 bottom
JP437  LOGO-SFESK  [SFE-LOGO-FLAME]  21.46,114.3 0 bottom
JP438  STAND-OFF  [STAND-OFF]  18.8,118.87 0 top
JP439  [1X03]  29.46,108.71 0 bottom
JP440  LOGO-SFESK  [SFE-LOGO-FLAME]  29.59,114.3 0 bottom
JP441  STAND-OFF  [STAND-OFF]  26.92,118.87 0 top
JP442  [1X03]  37.59,108.71 0 bottom
JP443  LOGO-SFESK  [SFE-LOGO-FLAME]  37.72,114.3 0 bottom
JP444  STAND-OFF  [STAND-OFF]  35.05,118.87 0 top
JP445  [1X03]  13.21,123.19 0 bottom
JP446  LOGO-SFESK  [SFE-LOGO-FLAME]  13.34,128.78 0 bottom
JP447  STAND-OFF  [STAND-OFF]  10.67,133.35 0 top
JP448  [1X03]  21.34,123.19 0 bottom
JP449  LOGO-SFESK  [SFE-LOGO-FLAME]  21.46,128.78 0 bottom
JP450  STAND-OFF  [STAND-OFF]  18.8,133.35 0 top
JP451  [1X03]  29.46,123.19 0 bottom
JP452  LOGO-SFESK  [SFE-LOGO-FLAME]  29.59,128.78 0 bottom
JP453  STAND-OFF  [STAND-OFF]  26.92,133.35 0 top
JP454  [1X03]  37.59,123.19 0 bottom
JP455  LOGO-SFESK  [SFE-LOGO-FLAME]  37.72,128.78 0 bottom
JP456  STAND-OFF  [STAND-OFF]  35.05,133.35 0 top
JP457  [1X03]  13.21,137.67 0 bottom
JP458  LOGO-SFESK  [SFE-LOGO-FLAME]  13.34,143.26 0 bottom
JP459  STAND-OFF  [STAND-OFF]  10.67,147.83 0 top
JP460  [1X03]  21.34,137.67 0 bottom
JP461  LOGO-SFESK  [SFE-LOGO-FLAME]  21.46,143.26 0 bottom
JP462  STAND-OFF  [STAND-OFF]  18.8,147.83 0 top
JP463  [1X03]  29.46,137.67 0 bottom
JP464  LOGO-SFESK  [SFE-LOGO-FLAME]  29.59,143.26 0 bottom
JP465  STAND-OFF  [STAND-OFF]  26.92,147.83 0 top
JP466  [1X03]  37.59,137.67 0 bottom
JP467  LOGO-SFESK  [SFE-LOGO-FLAME]  37.72,143.26 0 bottom
JP468  STAND-OFF  [STAND-OFF]  35.05,147.83 0 top
JP469  [1X03]  45.72,108.71 0 bottom
JP470  LOGO-SFESK  [SFE-LOGO-FLAME]  45.85,114.3 0 bottom
JP471  STAND-OFF  [STAND-OFF]  43.18,118.87 0 top
JP472  [1X03]  53.85,108.71 0 bottom
JP473  LOGO-SFESK  [SFE-LOGO-FLAME]  53.98,114.3 0 bottom
JP474  STAND-OFF  [STAND-OFF]  51.31,118.87 0 top
JP475  [1X03]  61.98,108.71 0 bottom
JP476  LOGO-SFESK  [SFE-LOGO-FLAME]  62.1,114.3 0 bottom
JP477  STAND-OFF  [STAND-OFF]  59.44,118.87 0 top
JP478  [1X03]  70.1,108.71 0 bottom
JP479  LOGO-SFESK  [SFE-LOGO-FLAME]  70.23,114.3 0 bottom
JP480  STAND-OFF  [STAND-OFF]  67.56,118.87 0 top
JP481  [1X03]  45.72,123.19 0 bottom
JP482  LOGO-SFESK  [SFE-LOGO-FLAME]  45.85,128.78 0 bottom
JP483  STAND-OFF  [STAND-OFF]  43.18,133.35 0 top
JP484  [1X03]  53.85,123.19 0 bottom
JP485  LOGO-SFESK  [SFE-LOGO-FLAME]  53.98,128.78 0 bottom
JP486  STAND-OFF  [STAND-OFF]  51.31,133.35 0 top
JP487  [1X03]  61.98,123.19 0 bottom
JP488  LOGO-SFESK  [SFE-LOGO-FLAME]  62.1,128.78 0 bottom
JP489  STAND-OFF  [STAND-OFF]  59.44,133.35 0 top
JP490  [1X03]  70.1,123.19 0 bottom
JP491  LOGO-SFESK  [SFE-LOGO-FLAME]  70.23,128.78 0 bottom
JP492  STAND-OFF  [STAND-OFF]  67.56,133.35 0 top
JP493  [1X03]  45.72,137.67 0 bottom
JP494  LOGO-SFESK  [SFE-LOGO-FLAME]  45.85,143.26 0 bottom
JP495  STAND-OFF  [STAND-OFF]  43.18,147.83 0 top
JP496  [1X03]  53.85,137.67 0 bottom
JP497  LOGO-SFESK  [SFE-LOGO-FLAME]  53.98,143.26 0 bottom
JP498  STAND-OFF  [STAND-OFF]  51.31,147.83 0 top
JP499  [1X03]  61.98,137.67 0 bottom
JP500  LOGO-SFESK  [SFE-LOGO-FLAME]  62.1,143.26 0 bottom
JP501  STAND-OFF  [STAND-OFF]  59.44,147.83 0 top
JP502  [1X03]  70.1,137.67 0 bottom
JP503  LOGO-SFESK  [SFE-LOGO-FLAME]  70.23,143.26 0 bottom
JP504  STAND-OFF  [STAND-OFF]  67.56,147.83 0 top
JP505  [1X03]  78.23,108.71 0 bottom
JP506  LOGO-SFESK  [SFE-LOGO-FLAME]  78.36,114.3 0 bottom
JP507  STAND-OFF  [STAND-OFF]  75.69,118.87 0 top
JP508  [1X03]  86.36,108.71 0 bottom
JP509  LOGO-SFESK  [SFE-LOGO-FLAME]  86.49,114.3 0 bottom
JP510  STAND-OFF  [STAND-OFF]  83.82,118.87 0 top
JP511  [1X03]  94.49,108.71 0 bottom
JP512  LOGO-SFESK  [SFE-LOGO-FLAME]  94.61,114.3 0 bottom
JP513  STAND-OFF  [STAND-OFF]  91.95,118.87 0 top
JP514  [1X03]  102.62,108.71 0 bottom
JP515  LOGO-SFESK  [SFE-LOGO-FLAME]  102.74,114.3 0 bottom
JP516  STAND-OFF  [STAND-OFF]  100.08,118.87 0 top
JP517  [1X03]  78.23,123.19 0 bottom
JP518  LOGO-SFESK  [SFE-LOGO-FLAME]  78.36,128.78 0 bottom
JP519  STAND-OFF  [STAND-OFF]  75.69,133.35 0 top
JP520  [1X03]  86.36,123.19 0 bottom
JP521  LOGO-SFESK  [SFE-LOGO-FLAME]  86.49,128.78 0 bottom
JP522  STAND-OFF  [STAND-OFF]  83.82,133.35 0 top
JP523  [1X03]  94.49,123.19 0 bottom
JP524  LOGO-SFESK  [SFE-LOGO-FLAME]  94.61,128.78 0 bottom
JP525  STAND-OFF  [STAND-OFF]  91.95,133.35 0 top
JP526  [1X03]  102.62,123.19 0 bottom
JP527  LOGO-SFESK  [SFE-LOGO-FLAME]  102.74,128.78 0 bottom
JP528  STAND-OFF  [STAND-OFF]  100.08,133.35 0 top
JP529  [1X03]  78.23,137.67 0 bottom
JP530  LOGO-SFESK  [SFE-LOGO-FLAME]  78.36,143.26 0 bottom
JP531  STAND-OFF  [STAND-OFF]  75.69,147.83 0 top
JP532  [1X03]  86.36,137.67 0 bottom
JP533  LOGO-SFESK  [SFE-LOGO-FLAME]  86.49,143.26 0 bottom
JP534  STAND-OFF  [STAND-OFF]  83.82,147.83 0 top
JP535  [1X03]  94.49,137.67 0 bottom
JP536  LOGO-SFESK  [SFE-LOGO-FLAME]  94.61,143.26 0 bottom
JP537  STAND-OFF  [STAND-OFF]  91.95,147.83 0 top
JP538  [1X03]  102.62,137.67 0 bottom
JP539  LOGO-SFESK  [SFE-LOGO-FLAME]  102.74,143.26 0 bottom
JP540  STAND-OFF  [STAND-OFF]  100.08,147.83 0 top
JP541  [1X03]  13.21,152.15 0 bottom
JP542  LOGO-SFESK  [SFE-LOGO-FLAME]  13.34,157.73 0 bottom
JP543  STAND-OFF  [STAND-OFF]  10.67,162.31 0 top
JP544  [1X03]  21.34,152.15 0 bottom
JP545  LOGO-SFESK  [SFE-LOGO-FLAME]  21.46,157.73 0 bottom
JP546  STAND-OFF  [STAND-OFF]  18.8,162.31 0 top
JP547  [1X03]  29.46,152.15 0 bottom
JP548  LOGO-SFESK  [SFE-LOGO-FLAME]  29.59,157.73 0 bottom
JP549  STAND-OFF  [STAND-OFF]  26.92,162.31 0 top
JP550  [1X03]  37.59,152.15 0 bottom
JP551  LOGO-SFESK  [SFE-LOGO-FLAME]  37.72,157.73 0 bottom
JP552  STAND-OFF  [STAND-OFF]  35.05,162.31 0 top
JP553  [1X03]  13.21,166.62 0 bottom
JP554  LOGO-SFESK  [SFE-LOGO-FLAME]  13.34,172.21 0 bottom
JP555  STAND-OFF  [STAND-OFF]  10.67,176.78 0 top
JP556  [1X03]  21.34,166.62 0 bottom
JP557  LOGO-SFESK  [SFE-LOGO-FLAME]  21.46,172.21 0 bottom
JP558  STAND-OFF  [STAND-OFF]  18.8,176.78 0 top
JP559  [1X03]  29.46,166.62 0 bottom
JP560  LOGO-SFESK  [SFE-LOGO-FLAME]  29.59,172.21 0 bottom
JP561  STAND-OFF  [STAND-OFF]  26.92,176.78 0 top
JP562  [1X03]  37.59,166.62 0 bottom
JP563  LOGO-SFESK  [SFE-LOGO-FLAME]  37.72,172.21 0 bottom
JP564  STAND-OFF  [STAND-OFF]  35.05,176.78 0 top
JP565  [1X03]  13.21,181.1 0 bottom
JP566  LOGO-SFESK  [SFE-LOGO-FLAME]  13.34,186.69 0 bottom
JP567  STAND-OFF  [STAND-OFF]  10.67,191.26 0 top
JP568  [1X03]  21.34,181.1 0 bottom
JP569  LOGO-SFESK  [SFE-LOGO-FLAME]  21.46,186.69 0 bottom
JP570  STAND-OFF  [STAND-OFF]  18.8,191.26 0 top
JP571  [1X03]  29.46,181.1 0 bottom
JP572  LOGO-SFESK  [SFE-LOGO-FLAME]  29.59,186.69 0 bottom
JP573  STAND-OFF  [STAND-OFF]  26.92,191.26 0 top
JP574  [1X03]  37.59,181.1 0 bottom
JP575  LOGO-SFESK  [SFE-LOGO-FLAME]  37.72,186.69 0 bottom
JP576  STAND-OFF  [STAND-OFF]  35.05,191.26 0 top
JP577  [1X03]  45.72,152.15 0 bottom
JP578  LOGO-SFESK  [SFE-LOGO-FLAME]  45.85,157.73 0 bottom
JP579  STAND-OFF  [STAND-OFF]  43.18,162.31 0 top
JP580  [1X03]  53.85,152.15 0 bottom
JP581  LOGO-SFESK  [SFE-LOGO-FLAME]  53.98,157.73 0 bottom
JP582  STAND-OFF  [STAND-OFF]  51.31,162.31 0 top
JP583  [1X03]  61.98,152.15 0 bottom
JP584  LOGO-SFESK  [SFE-LOGO-FLAME]  62.1,157.73 0 bottom
JP585  STAND-OFF  [STAND-OFF]  59.44,162.31 0 top
JP586  [1X03]  70.1,152.15 0 bottom
JP587  LOGO-SFESK  [SFE-LOGO-FLAME]  70.23,157.73 0 bottom
JP588  STAND-OFF  [STAND-OFF]  67.56,162.31 0 top
JP589  [1X03]  45.72,166.62 0 bottom
JP590  LOGO-SFESK  [SFE-LOGO-FLAME]  45.85,172.21 0 bottom
JP591  STAND-OFF  [STAND-OFF]  43.18,176.78 0 top
JP592  [1X03]  53.85,166.62 0 bottom
JP593  LOGO-SFESK  [SFE-LOGO-FLAME]  53.98,172.21 0 bottom
JP594  STAND-OFF  [STAND-OFF]  51.31,176.78 0 top
JP595  [1X03]  61.98,166.62 0 bottom
JP596  LOGO-SFESK  [SFE-LOGO-FLAME]  62.1,172.21 0 bottom
JP597  STAND-OFF  [STAND-OFF]  59.44,176.78 0 top
JP598  [1X03]  70.1,166.62 0 bottom
JP599  LOGO-SFESK  [SFE-LOGO-FLAME]  70.23,172.21 0 bottom
JP600  STAND-OFF  [STAND-OFF]  67.56,176.78 0 top
JP601  [1X03]  45.72,181.1 0 bottom
JP602  LOGO-SFESK  [SFE-LOGO-FLAME]  45.85,186.69 0 bottom
JP603  STAND-OFF  [STAND-OFF]  43.18,191.26 0 top
JP604  [1X03]  53.85,181.1 0 bottom
JP605  LOGO-SFESK  [SFE-LOGO-FLAME]  53.98,186.69 0 bottom
JP606  STAND-OFF  [STAND-OFF]  51.31,191.26 0 top
JP607  [1X03]  61.98,181.1 0 bottom
JP608  LOGO-SFESK  [SFE-LOGO-FLAME]  62.1,186.69 0 bottom
JP609  STAND-OFF  [STAND-OFF]  59.44,191.26 0 top
JP610  [1X03]  70.1,181.1 0 bottom
JP611  LOGO-SFESK  [SFE-LOGO-FLAME]  70.23,186.69 0 bottom
JP612  STAND-OFF  [STAND-OFF]  67.56,191.26 0 top
JP613  [1X03]  78.23,152.15 0 bottom
JP614  LOGO-SFESK  [SFE-LOGO-FLAME]  78.36,157.73 0 bottom
JP615  STAND-OFF  [STAND-OFF]  75.69,162.31 0 top
JP616  [1X03]  86.36,152.15 0 bottom
JP617  LOGO-SFESK  [SFE-LOGO-FLAME]  86.49,157.73 0 bottom
JP618  STAND-OFF  [STAND-OFF]  83.82,162.31 0 top
JP619  [1X03]  94.49,152.15 0 bottom
JP620  LOGO-SFESK  [SFE-LOGO-FLAME]  94.61,157.73 0 bottom
JP621  STAND-OFF  [STAND-OFF]  91.95,162.31 0 top
JP622  [1X03]  102.62,152.15 0 bottom
JP623  LOGO-SFESK  [SFE-LOGO-FLAME]  102.74,157.73 0 bottom
JP624  STAND-OFF  [STAND-OFF]  100.08,162.31 0 top
JP625  [1X03]  78.23,166.62 0 bottom
JP626  LOGO-SFESK  [SFE-LOGO-FLAME]  78.36,172.21 0 bottom
JP627  STAND-OFF  [STAND-OFF]  75.69,176.78 0 top
JP628  [1X03]  86.36,166.62 0 bottom
JP629  LOGO-SFESK  [SFE-LOGO-FLAME]  86.49,172.21 0 bottom
JP630  STAND-OFF  [STAND-OFF]  83.82,176.78 0 top
JP631  [1X03]  94.49,166.62 0 bottom
JP632  LOGO-SFESK  [SFE-LOGO-FLAME]  94.61,172.21 0 bottom
JP633  STAND-OFF  [STAND-OFF]  91.95,176.78 0 top
JP634  [1X03]  102.62,166.62 0 bottom
JP635  LOGO-SFESK  [SFE-LOGO-FLAME]  102.74,172.21 0 bottom
JP636  STAND-OFF  [STAND-OFF]  100.08,176.78 0 top
JP637  [1X03]  78.23,181.1 0 bottom
JP638  LOGO-SFESK  [SFE-LOGO-FLAME]  78.36,186.69 0 bottom
JP639  STAND-OFF  [STAND-OFF]  75.69,191.26 0 top
JP640  [1X03]  86.36,181.1 0 bottom
JP641  LOGO-SFESK  [SFE-LOGO-FLAME]  86.49,186.69 0 bottom
JP642  STAND-OFF  [STAND-OFF]  83.82,191.26 0 top
JP643  [1X03]  94.49,181.1 0 bottom
JP644  LOGO-SFESK  [SFE-LOGO-FLAME]  94.61,186.69 0 bottom
JP645  STAND-OFF  [STAND-OFF]  91.95,191.26 0 top
JP646  [1X03]  102.62,181.1 0 bottom
JP647  LOGO-SFESK  [SFE-LOGO-FLAME]  102.74,186.69 0 bottom
JP648  STAND-OFF  [STAND-OFF]  100.08,191.26 0 top
JP649  [1X03]  124.46,108.71 0 bottom
JP650  LOGO-SFESK  [SFE-LOGO-FLAME]  124.59,114.3 0 bottom
JP651  STAND-OFF  [STAND-OFF]  121.92,118.87 0 top
JP652  [1X03]  132.59,108.71 0 bottom
JP653  LOGO-SFESK  [SFE-LOGO-FLAME]  132.72,114.3 0 bottom
JP654  STAND-OFF  [STAND-OFF]  130.05,118.87 0 top
JP655  [1X03]  140.72,108.71 0 bottom
JP656  LOGO-SFESK  [SFE-LOGO-FLAME]  140.84,114.3 0 bottom
JP657  STAND-OFF  [STAND-OFF]  138.18,118.87 0 top
JP658  [1X03]  148.84,108.71 0 bottom
JP659  LOGO-SFESK  [SFE-LOGO-FLAME]  148.97,114.3 0 bottom
JP660  STAND-OFF  [STAND-OFF]  146.3,118.87 0 top
JP661  [1X03]  124.46,123.19 0 bottom
JP662  LOGO-SFESK  [SFE-LOGO-FLAME]  124.59,128.78 0 bottom
JP663  STAND-OFF  [STAND-OFF]  121.92,133.35 0 top
JP664  [1X03]  132.59,123.19 0 bottom
JP665  LOGO-SFESK  [SFE-LOGO-FLAME]  132.72,128.78 0 bottom
JP666  STAND-OFF  [STAND-OFF]  130.05,133.35 0 top
JP667  [1X03]  140.72,123.19 0 bottom
JP668  LOGO-SFESK  [SFE-LOGO-FLAME]  140.84,128.78 0 bottom
JP669  STAND-OFF  [STAND-OFF]  138.18,133.35 0 top
JP670  [1X03]  148.84,123.19 0 bottom
JP671  LOGO-SFESK  [SFE-LOGO-FLAME]  148.97,128.78 0 bottom
JP672  STAND-OFF  [STAND-OFF]  146.3,133.35 0 top
JP673  [1X03]  124.46,137.67 0 bottom
JP674  LOGO-SFESK  [SFE-LOGO-FLAME]  124.59,143.26 0 bottom
JP675  STAND-OFF  [STAND-OFF]  121.92,147.83 0 top
JP676  [1X03]  132.59,137.67 0 bottom
JP677  LOGO-SFESK  [SFE-LOGO-FLAME]  132.72,143.26 0 bottom
JP678  STAND-OFF  [STAND-OFF]  130.05,147.83 0 top
JP679  [1X03]  140.72,137.67 0 bottom
JP680  LOGO-SFESK  [SFE-LOGO-FLAME]  140.84,143.26 0 bottom
JP681  STAND-OFF  [STAND-OFF]  138.18,147.83 0 top
JP682  [1X03]  148.84,137.67 0 bottom
JP683  LOGO-SFESK  [SFE-LOGO-FLAME]  148.97,143.26 0 bottom
JP684  STAND-OFF  [STAND-OFF]  146.3,147.83 0 top
JP685  [1X03]  156.97,108.71 0 bottom
JP686  LOGO-SFESK  [SFE-LOGO-FLAME]  157.1,114.3 0 bottom
JP687  STAND-OFF  [STAND-OFF]  154.43,118.87 0 top
JP688  [1X03]  165.1,108.71 0 bottom
JP689  LOGO-SFESK  [SFE-LOGO-FLAME]  165.23,114.3 0 bottom
JP690  STAND-OFF  [STAND-OFF]  162.56,118.87 0 top
JP691  [1X03]  173.23,108.71 0 bottom
JP692  LOGO-SFESK  [SFE-LOGO-FLAME]  173.35,114.3 0 bottom
JP693  STAND-OFF  [STAND-OFF]  170.69,118.87 0 top
JP694  [1X03]  181.36,108.71 0 bottom
JP695  LOGO-SFESK  [SFE-LOGO-FLAME]  181.48,114.3 0 bottom
JP696  STAND-OFF  [STAND-OFF]  178.82,118.87 0 top
JP697  [1X03]  156.97,123.19 0 bottom
JP698  LOGO-SFESK  [SFE-LOGO-FLAME]  157.1,128.78 0 bottom
JP699  STAND-OFF  [STAND-OFF]  154.43,133.35 0 top
JP700  [1X03]  165.1,123.19 0 bottom
JP701  LOGO-SFESK  [SFE-LOGO-FLAME]  165.23,128.78 0 bottom
JP702  STAND-OFF  [STAND-OFF]  162.56,133.35 0 top
JP703  [1X03]  173.23,123.19 0 bottom
JP704  LOGO-SFESK  [SFE-LOGO-FLAME]  173.35,128.78 0 bottom
JP705  STAND-OFF  [STAND-OFF]  170.69,133.35 0 top
JP706  [1X03]  181.36,123.19 0 bottom
JP707  LOGO-SFESK  [SFE-LOGO-FLAME]  181.48,128.78 0 bottom
JP708  STAND-OFF  [STAND-OFF]  178.82,133.35 0 top
JP709  [1X03]  156.97,137.67 0 bottom
JP710  LOGO-SFESK  [SFE-LOGO-FLAME]  157.1,143.26 0 bottom
JP711  STAND-OFF  [STAND-OFF]  154.43,147.83 0 top
JP712  [1X03]  165.1,137.67 0 bottom
JP713  LOGO-SFESK  [SFE-LOGO-FLAME]  165.23,143.26 0 bottom
JP714  STAND-OFF  [STAND-OFF]  162.56,147.83 0 top
JP715  [1X03]  173.23,137.67 0 bottom
JP716  LOGO-SFESK  [SFE-LOGO-FLAME]  173.35,143.26 0 bottom
JP717  STAND-OFF  [STAND-OFF]  170.69,147.83 0 top
JP718  [1X03]  181.36,137.67 0 bottom
JP719  LOGO-SFESK  [SFE-LOGO-FLAME]  181.48,143.26 0 bottom
JP720  STAND-OFF  [STAND-OFF]  178.82,147.83 0 top
JP721  [1X03]  189.48,108.71 0 bottom
JP722  LOGO-SFESK  [SFE-LOGO-FLAME]  189.61,114.3 0 bottom
JP723  STAND-OFF  [STAND-OFF]  186.94,118.87 0 top
JP724  [1X03]  197.61,108.71 0 bottom
JP725  LOGO-SFESK  [SFE-LOGO-FLAME]  197.74,114.3 0 bottom
JP726  STAND-OFF  [STAND-OFF]  195.07,118.87 0 top
JP727  [1X03]  205.74,108.71 0 bottom
JP728  LOGO-SFESK  [SFE-LOGO-FLAME]  205.87,114.3 0 bottom
JP729  STAND-OFF  [STAND-OFF]  203.2,118.87 0 top
JP730  [1X03]  213.87,108.71 0 bottom
JP731  LOGO-SFESK  [SFE-LOGO-FLAME]  214,114.3 0 bottom
JP732  STAND-OFF  [STAND-OFF]  211.33,118.87 0 top
JP733  [1X03]  189.48,123.19 0 bottom
JP734  LOGO-SFESK  [SFE-LOGO-FLAME]  189.61,128.78 0 bottom
JP735  STAND-OFF  [STAND-OFF]  186.94,133.35 0 top
JP736  [1X03]  197.61,123.19 0 bottom
JP737  LOGO-SFESK  [SFE-LOGO-FLAME]  197.74,128.78 0 bottom
JP738  STAND-OFF  [STAND-OFF]  195.07,133.35 0 top
JP739  [1X03]  205.74,123.19 0 bottom
JP740  LOGO-SFESK  [SFE-LOGO-FLAME]  205.87,128.78 0 bottom
JP741  STAND-OFF  [STAND-OFF]  203.2,133.35 0 top
JP742  [1X03]  213.87,123.19 0 bottom
JP743  LOGO-SFESK  [SFE-LOGO-FLAME]  214,128.78 0 bottom
JP744  STAND-OFF  [STAND-OFF]  211.33,133.35 0 top
JP745  [1X03]  189.48,137.67 0 bottom
JP746  LOGO-SFESK  [SFE-LOGO-FLAME]  189.61,143.26 0 bottom
JP747  STAND-OFF  [STAND-OFF]  186.94,147.83 0 top
JP748  [1X03]  197.61,137.67 0 bottom
JP749  LOGO-SFESK  [SFE-LOGO-FLAME]  197.74,143.26 0 bottom
JP750  STAND-OFF  [STAND-OFF]  195.07,147.83 0 top
JP751  [1X03]  205.74,137.67 0 bottom
JP752  LOGO-SFESK  [SFE-LOGO-FLAME]  205.87,143.26 0 bottom
JP753  STAND-OFF  [STAND-OFF]  203.2,147.83 0 top
JP754  [1X03]  213.87,137.67 0 bottom
JP755  LOGO-SFESK  [SFE-LOGO-FLAME]  214,143.26 0 bottom
JP756  STAND-OFF  [STAND-OFF]  211.33,147.83 0 top
JP757  [1X03]  124.46,152.15 0 bottom
JP758  LOGO-SFESK  [SFE-LOGO-FLAME]  124.59,157.73 0 bottom
JP759  STAND-OFF  [STAND-OFF]  121.92,162.31 0 top
JP760  [1X03]  132.59,152.15 0 bottom
JP761  LOGO-SFESK  [SFE-LOGO-FLAME]  132.72,157.73 0 bottom
JP762  STAND-OFF  [STAND-OFF]  130.05,162.31 0 top
JP763  [1X03]  140.72,152.15 0 bottom
JP764  LOGO-SFESK  [SFE-LOGO-FLAME]  140.84,157.73 0 bottom
JP765  STAND-OFF  [STAND-OFF]  138.18,162.31 0 top
JP766  [1X03]  148.84,152.15 0 bottom
JP767  LOGO-SFESK  [SFE-LOGO-FLAME]  148.97,157.73 0 bottom
JP768  STAND-OFF  [STAND-OFF]  146.3,162.31 0 top
JP769  [1X03]  124.46,166.62 0 bottom
JP770  LOGO-SFESK  [SFE-LOGO-FLAME]  124.59,172.21 0 bottom
JP771  STAND-OFF  [STAND-OFF]  121.92,176.78 0 top
JP772  [1X03]  132.59,166.62 0 bottom
JP773  LOGO-SFESK  [SFE-LOGO-FLAME]  132.72,172.21 0 bottom
JP774  STAND-OFF  [STAND-OFF]  130.05,176.78 0 top
JP775  [1X03]  140.72,166.62 0 bottom
JP776  LOGO-SFESK  [SFE-LOGO-FLAME]  140.84,172.21 0 bottom
JP777  STAND-OFF  [STAND-OFF]  138.18,176.78 0 top
JP778  [1X03]  148.84,166.62 0 bottom
JP779  LOGO-SFESK  [SFE-LOGO-FLAME]  148.97,172.21 0 bottom
JP780  STAND-OFF  [STAND-OFF]  146.3,176.78 0 top
JP781  [1X03]  124.46,181.1 0 bottom
JP782  LOGO-SFESK  [SFE-LOGO-FLAME]  124.59,186.69 0 bottom
JP783  STAND-OFF  [STAND-OFF]  121.92,191.26 0 top
JP784  [1X03]  132.59,181.1 0 bottom
JP785  LOGO-SFESK  [SFE-LOGO-FLAME]  132.72,186.69 0 bottom
JP786  STAND-OFF  [STAND-OFF]  130.05,191.26 0 top
JP787  [1X03]  140.72,181.1 0 bottom
JP788  LOGO-SFESK  [SFE-LOGO-FLAME]  140.84,186.69 0 bottom
JP789  STAND-OFF  [STAND-OFF]  138.18,191.26 0 top
JP790  [1X03]  148.84,181.1 0 bottom
JP791  LOGO-SFESK  [SFE-LOGO-FLAME]  148.97,186.69 0 bottom
JP792  STAND-OFF  [STAND-OFF]  146.3,191.26 0 top
JP793  [1X03]  156.97,152.15 0 bottom
JP794  LOGO-SFESK  [SFE-LOGO-FLAME]  157.1,157.73 0 bottom
JP795  STAND-OFF  [STAND-OFF]  154.43,162.31 0 top
JP796  [1X03]  165.1,152.15 0 bottom
JP797  LOGO-SFESK  [SFE-LOGO-FLAME]  165.23,157.73 0 bottom
JP798  STAND-OFF  [STAND-OFF]  162.56,162.31 0 top
JP799  [1X03]  173.23,152.15 0 bottom
JP800  LOGO-SFESK  [SFE-LOGO-FLAME]  173.35,157.73 0 bottom
JP801  STAND-OFF  [STAND-OFF]  170.69,162.31 0 top
JP802  [1X03]  181.36,152.15 0 bottom
JP803  LOGO-SFESK  [SFE-LOGO-FLAME]  181.48,157.73 0 bottom
JP804  STAND-OFF  [STAND-OFF]  178.82,162.31 0 top
JP805  [1X03]  156.97,166.62 0 bottom
JP806  LOGO-SFESK  [SFE-LOGO-FLAME]  157.1,172.21 0 bottom
JP807  STAND-OFF  [STAND-OFF]  154.43,176.78 0 top
JP808  [1X03]  165.1,166.62 0 bottom
JP809  LOGO-SFESK  [SFE-LOGO-FLAME]  165.23,172.21 0 bottom
JP810  STAND-OFF  [STAND-OFF]  162.56,176.78 0 top
JP811  [1X03]  173.23,166.62 0 bottom
JP812  LOGO-SFESK  [SFE-LOGO-FLAME]  173.35,172.21 0 bottom
JP813  STAND-OFF  [STAND-OFF]  170.69,176.78 0 top
JP814  [1X03]  181.36,166.62 0 bottom
JP815  LOGO-SFESK  [SFE-LOGO-FLAME]  181.48,172.21 0 bottom
JP816  STAND-OFF  [STAND-OFF]  178.82,176.78 0 top
JP817  [1X03]  156.97,181.1 0 bottom
JP818  LOGO-SFESK  [SFE-LOGO-FLAME]  157.1,186.69 0 bottom
JP819  STAND-OFF  [STAND-OFF]  154.43,191.26 0 top
JP820  [1X03]  165.1,181.1 0 bottom
JP821  LOGO-SFESK  [SFE-LOGO-FLAME]  165.23,186.69 0 bottom
JP822  STAND-OFF  [STAND-OFF]  162.56,191.26 0 top
JP823  [1X03]  173.23,181.1 0 bottom
JP824  LOGO-SFESK  [SFE-LOGO-FLAME]  173.35,186.69 0 bottom
JP825  STAND-OFF  [STAND-OFF]  170.69,191.26 0 top
JP826  [1X03]  181.36,181.1 0 bottom
JP827  LOGO-SFESK  [SFE-LOGO-FLAME]  181.48,186.69 0 bottom
JP828  STAND-OFF  [STAND-OFF]  178.82,191.26 0 top
JP829  [1X03]  189.48,152.15 0 bottom
JP830  LOGO-SFESK  [SFE-LOGO-FLAME]  189.61,157.73 0 bottom
JP831  STAND-OFF  [STAND-OFF]  186.94,162.31 0 top
JP832  [1X03]  197.61,152.15 0 bottom
JP833  LOGO-SFESK  [SFE-LOGO-FLAME]  197.74,157.73 0 bottom
JP834  STAND-OFF  [STAND-OFF]  195.07,162.31 0 top
JP835  [1X03]  205.74,152.15 0 bottom
JP836  LOGO-SFESK  [SFE-LOGO-FLAME]  205.87,157.73 0 bottom
JP837  STAND-OFF  [STAND-OFF]  203.2,162.31 0 top
JP838  [1X03]  213.87,152.15 0 bottom
JP839  LOGO-SFESK  [SFE-LOGO-FLAME]  214,157.73 0 bottom
JP840  STAND-OFF  [STAND-OFF]  211.33,162.31 0 top
JP841  [1X03]  189.48,166.62 0 bottom
JP842  LOGO-SFESK  [SFE-LOGO-FLAME]  189.61,172.21 0 bottom
JP843  STAND-OFF  [STAND-OFF]  186.94,176.78 0 top
JP844  [1X03]  197.61,166.62 0 bottom
JP845  LOGO-SFESK  [SFE-LOGO-FLAME]  197.74,172.21 0 bottom
JP846  STAND-OFF  [STAND-OFF]  195.07,176.78 0 top
JP847  [1X03]  205.74,166.62 0 bottom
JP848  LOGO-SFESK  [SFE-LOGO-FLAME]  205.87,172.21 0 bottom
JP849  STAND-OFF  [STAND-OFF]  203.2,176.78 0 top
JP850  [1X03]  213.87,166.62 0 bottom
JP851  LOGO-SFESK  [SFE-LOGO-FLAME]  214,172.21 0 bottom
JP852  STAND-OFF  [STAND-OFF]  211.33,176.78 0 top
JP853  [1X03]  189.48,181.1 0 bottom
JP854  LOGO-SFESK  [SFE-LOGO-FLAME]  189.61,186.69 0 bottom
JP855  STAND-OFF  [STAND-OFF]  186.94,191.26 0 top
JP856  [1X03]  197.61,181.1 0 bottom
JP857  LOGO-SFESK  [SFE-LOGO-FLAME]  197.74,186.69 0 bottom
JP858  STAND-OFF  [STAND-OFF]  195.07,191.26 0 top
JP859  [1X03]  205.74,181.1 0 bottom
JP860  LOGO-SFESK  [SFE-LOGO-FLAME]  205.87,186.69 0 bottom
JP861  STAND-OFF  [STAND-OFF]  203.2,191.26 0 top
JP862  [1X03]  213.87,181.1 0 bottom
JP863  LOGO-SFESK  [SFE-LOGO-FLAME]  214,186.69 0 bottom
JP864  STAND-OFF  [STAND-OFF]  211.33,191.26 0 top
R1  100  [0603-RES]  12.19,10.67 180 top
R2  10K  [0603-RES]  9.14,10.67 180 top
R3  100  [0603-RES]  20.32,10.67 180 top
R4  10K  [0603-RES]  17.27,10.67 180 top
R5  100  [0603-RES]  28.45,10.67 180 top
R6  10K  [0603-RES]  25.4,10.67 180 top
R7  100  [0603-RES]  36.58,10.67 180 top
R8  10K  [0603-RES]  33.53,10.67 180 top
R9  100  [0603-RES]  12.19,25.15 180 top
R10  10K  [0603-RES]  9.14,25.15 180 top
R11  100  [0603-RES]  20.32,25.15 180 top
R12  10K  [0603-RES]  17.27,25.15 180 top
R13  100  [0603-RES]  28.45,25.15 180 top
R14  10K  [0603-RES]  25.4,25.15 180 top
R15  100  [0603-RES]  36.58,25.15 180 top
R16  10K  [0603-RES]  33.53,25.15 180 top
R17  100  [0603-RES]  12.19,39.62 180 top
R18  10K  [0603-RES]  9.14,39.62 180 top
R19  100  [0603-RES]  20.32,39.62 180 top
R20  10K  [0603-RES]  17.27,39.62 180 top
R21  100  [0603-RES]  28.45,39.62 180 top
R22  10K  [0603-RES]  25.4,39.62 180 top
R23  100  [0603-RES]  36.58,39.62 180 top
R24  10K  [0603-RES]  33.53,39.62 180 top
R25  100  [0603-RES]  44.7,10.67 180 top
R26  10K  [0603-RES]  41.66,10.67 180 top
R27  100  [0603-RES]  52.83,10.67 180 top
R28  10K  [0603-RES]  49.78,10.67 180 top
R29  100  [0603-RES]  60.96,10.67 180 top
R30  10K  [0603-RES]  57.91,10.67 180 top
R31  100  [0603-RES]  69.09,10.67 180 top
R32  10K  [0603-RES]  66.04,10.67 180 top
R33  100  [0603-RES]  44.7,25.15 180 top
R34  10K  [0603-RES]  41.66,25.15 180 top
R35  100  [0603-RES]  52.83,25.15 180 top
R36  10K  [0603-RES]  49.78,25.15 180 top
R37  100  [0603-RES]  60.96,25.15 180 top
R38  10K  [0603-RES]  57.91,25.15 180 top
R39  100  [0603-RES]  69.09,25.15 180 top
R40  10K  [0603-RES]  66.04,25.15 180 top
R41  100  [0603-RES]  44.7,39.62 180 top
R42  10K  [0603-RES]  41.66,39.62 180 top
R43  100  [0603-RES]  52.83,39.62 180 top
R44  10K  [0603-RES]  49.78,39.62 180 top
R45  100  [0603-RES]  60.96,39.62 180 top
R46  10K  [0603-RES]  57.91,39.62 180 top
R47  100  [0603-RES]  69.09,39.62 180 top
R48  10K  [0603-RES]  66.04,39.62 180 top
R49  100  [0603-RES]  77.22,10.67 180 top
R50  10K  [0603-RES]  74.17,10.67 180 top
R51  100  [0603-RES]  85.34,10.67 180 top
R52  10K  [0603-RES]  82.3,10.67 180 top
R53  100  [0603-RES]  93.47,10.67 180 top
R54  10K  [0603-RES]  90.42,10.67 180 top
R55  100  [0603-RES]  101.6,10.67 180 top
R56  10K  [0603-RES]  98.55,10.67 180 top
R57  100  [0603-RES]  77.22,25.15 180 top
R58  10K  [0603-RES]  74.17,25.15 180 top
R59  100  [0603-RES]  85.34,25.15 180 top
R60  10K  [0603-RES]  82.3,25.15 180 top
R61  100  [0603-RES]  93.47,25.15 180 top
R62  10K  [0603-RES]  90.42,25.15 180 top
R63  100  [0603-RES]  101.6,25.15 180 top
R64  10K  [0603-RES]  98.55,25.15 180 top
R65  100  [0603-RES]  77.22,39.62 180 top
R66  10K  [0603-RES]  74.17,39.62 180 top
R67  100  [0603-RES]  85.34,39.62 180 top
R68  10K  [0603-RES]  82.3,39.62 180 top
R69  100  [0603-RES]  93.47,39.62 180 top
R70  10K  [0603-RES]  90.42,39.62 180 top
R71  100  [0603-RES]  101.6,39.62 180 top
R72  10K  [0603-RES]  98.55,39.62 180 top
R73  100  [0603-RES]  12.19,54.1 180 top
R74  10K  [0603-RES]  9.14,54.1 180 top
R75  100  [0603-RES]  20.32,54.1 180 top
R76  10K  [0603-RES]  17.27,54.1 180 top
R77  100  [0603-RES]  28.45,54.1 180 top
R78  10K  [0603-RES]  25.4,54.1 180 top
R79  100  [0603-RES]  36.58,54.1 180 top
R80  10K  [0603-RES]  33.53,54.1 180 top
R81  100  [0603-RES]  12.19,68.58 180 top
R82  10K  [0603-RES]  9.14,68.58 180 top
R83  100  [0603-RES]  20.32,68.58 180 top
R84  10K  [0603-RES]  17.27,68.58 180 top
R85  100  [0603-RES]  28.45,68.58 180 top
R86  10K  [0603-RES]  25.4,68.58 180 top
R87  100  [0603-RES]  36.58,68.58 180 top
R88  10K  [0603-RES]  33.53,68.58 180 top
R89  100  [0603-RES]  12.19,83.06 180 top
R90  10K  [0603-RES]  9.14,83.06 180 top
R91  100  [0603-RES]  20.32,83.06 180 top
R92  10K  [0603-RES]  17.27,83.06 180 top
R93  100  [0603-RES]  28.45,83.06 180 top
R94  10K  [0603-RES]  25.4,83.06 180 top
R95  100  [0603-RES]  36.58,83.06 180 top
R96  10K  [0603-RES]  33.53,83.06 180 top
R97  100  [0603-RES]  44.7,54.1 180 top
R98  10K  [0603-RES]  41.66,54.1 180 top
R99  100  [0603-RES]  52.83,54.1 180 top
R100  10K  [0603-RES]  49.78,54.1 180 top
R101  100  [0603-RES]  60.96,54.1 180 top
R102  10K  [0603-RES]  57.91,54.1 180 top
R103  100  [0603-RES]  69.09,54.1 180 top
R104  10K  [0603-RES]  66.04,54.1 180 top
R105  100  [0603-RES]  44.7,68.58 180 top
R106  10K  [0603-RES]  41.66,68.58 180 top
R107  100  [0603-RES]  52.83,68.58 180 top
R108  10K  [0603-RES]  49.78,68.58 180 top
R109  100  [0603-RES]  60.96,68.58 180 top
R110  10K  [0603-RES]  57.91,68.58 180 top
R111  100  [0603-RES]  69.09,68.58 180 top
R112  10K  [0603-RES]  66.04,68.58 180 top
R113  100  [0603-RES]  44.7,83.06 180 top
R114  10K  [0603-RES]  41.66,83.06 180 top
R115  100  [0603-RES]  52.83,83.06 180 top
R116  10K  [0603-RES]  49.78,83.06 180 top
R117  100  [0603-RES]  60.96,83.06 180 top
R118  10K  [0603-RES]  57.91,83.06 180 top
R119  100  [0603-RES]  69.09,83.06 180 top
R120  10K  [0603-RES]  66.04,83.06 180 top
R121  100  [0603-RES]  77.22,54.1 180 top
R122  10K  [0603-RES]  74.17,54.1 180 top
R123  100  [0603-RES]  85.34,54.1 180 top
R124  10K  [0603-RES]  82.3,54.1 180 top
R125  100  [0603-RES]  93.47,54.1 180 top
R126  10K  [0603-RES]  90.42,54.1 180 top
R127  100  [0603-RES]  101.6,54.1 180 top
R128  10K  [0603-RES]  98.55,54.1 180 top
R129  100  [0603-RES]  77.22,68.58 180 top
R130  10K  [0603-RES]  74.17,68.58 180 top
R131  100  [0603-RES]  85.34,68.58 180 top
R132  10K  [0603-RES]  82.3,68.58 180 top
R133  100  [0603-RES]  93.47,68.58 180 top
R134  10K  [0603-RES]  90.42,68.58 180 top
R135  100  [0603-RES]  101.6,68.58 180 top
R136  10K  [0603-RES]  98.55,68.58 180 top
R137  100  [0603-RES]  77.22,83.06 180 top
R138  10K  [0603-RES]  74.17,83.06 180 top
R139  100  [0603-RES]  85.34,83.06 180 top
R140  10K  [0603-RES]  82.3,83.06 180 top
R141  100  [0603-RES]  93.47,83.06 180 top
R142  10K  [0603-RES]  90.42,83.06 180 top
R143  100  [0603-RES]  101.6,83.06 180 top
R144  10K  [0603-RES]  98.55,83.06 180 top
R145  100  [0603-RES]  123.44,10.67 180 top
R146  10K  [0603-RES]  120.4,10.67 180 top
R147  100  [0603-RES]  131.57,10.67 180 top
R148  10K  [0603-RES]  128.52,10.67 180 top
R149  100  [0603-RES]  139.7,10.67 180 top
R150  10K  [0603-RES]  136.65,10.67 180 top
R151  100  [0603-RES]  147.83,10.67 180 top
R152  10K  [0603-RES]  144.78,10.67 180 top
R153  100  [0603-RES]  123.44,25.15 180 top